# Allegro board RPI-CMIO-V3_0-PUBLIC.brd
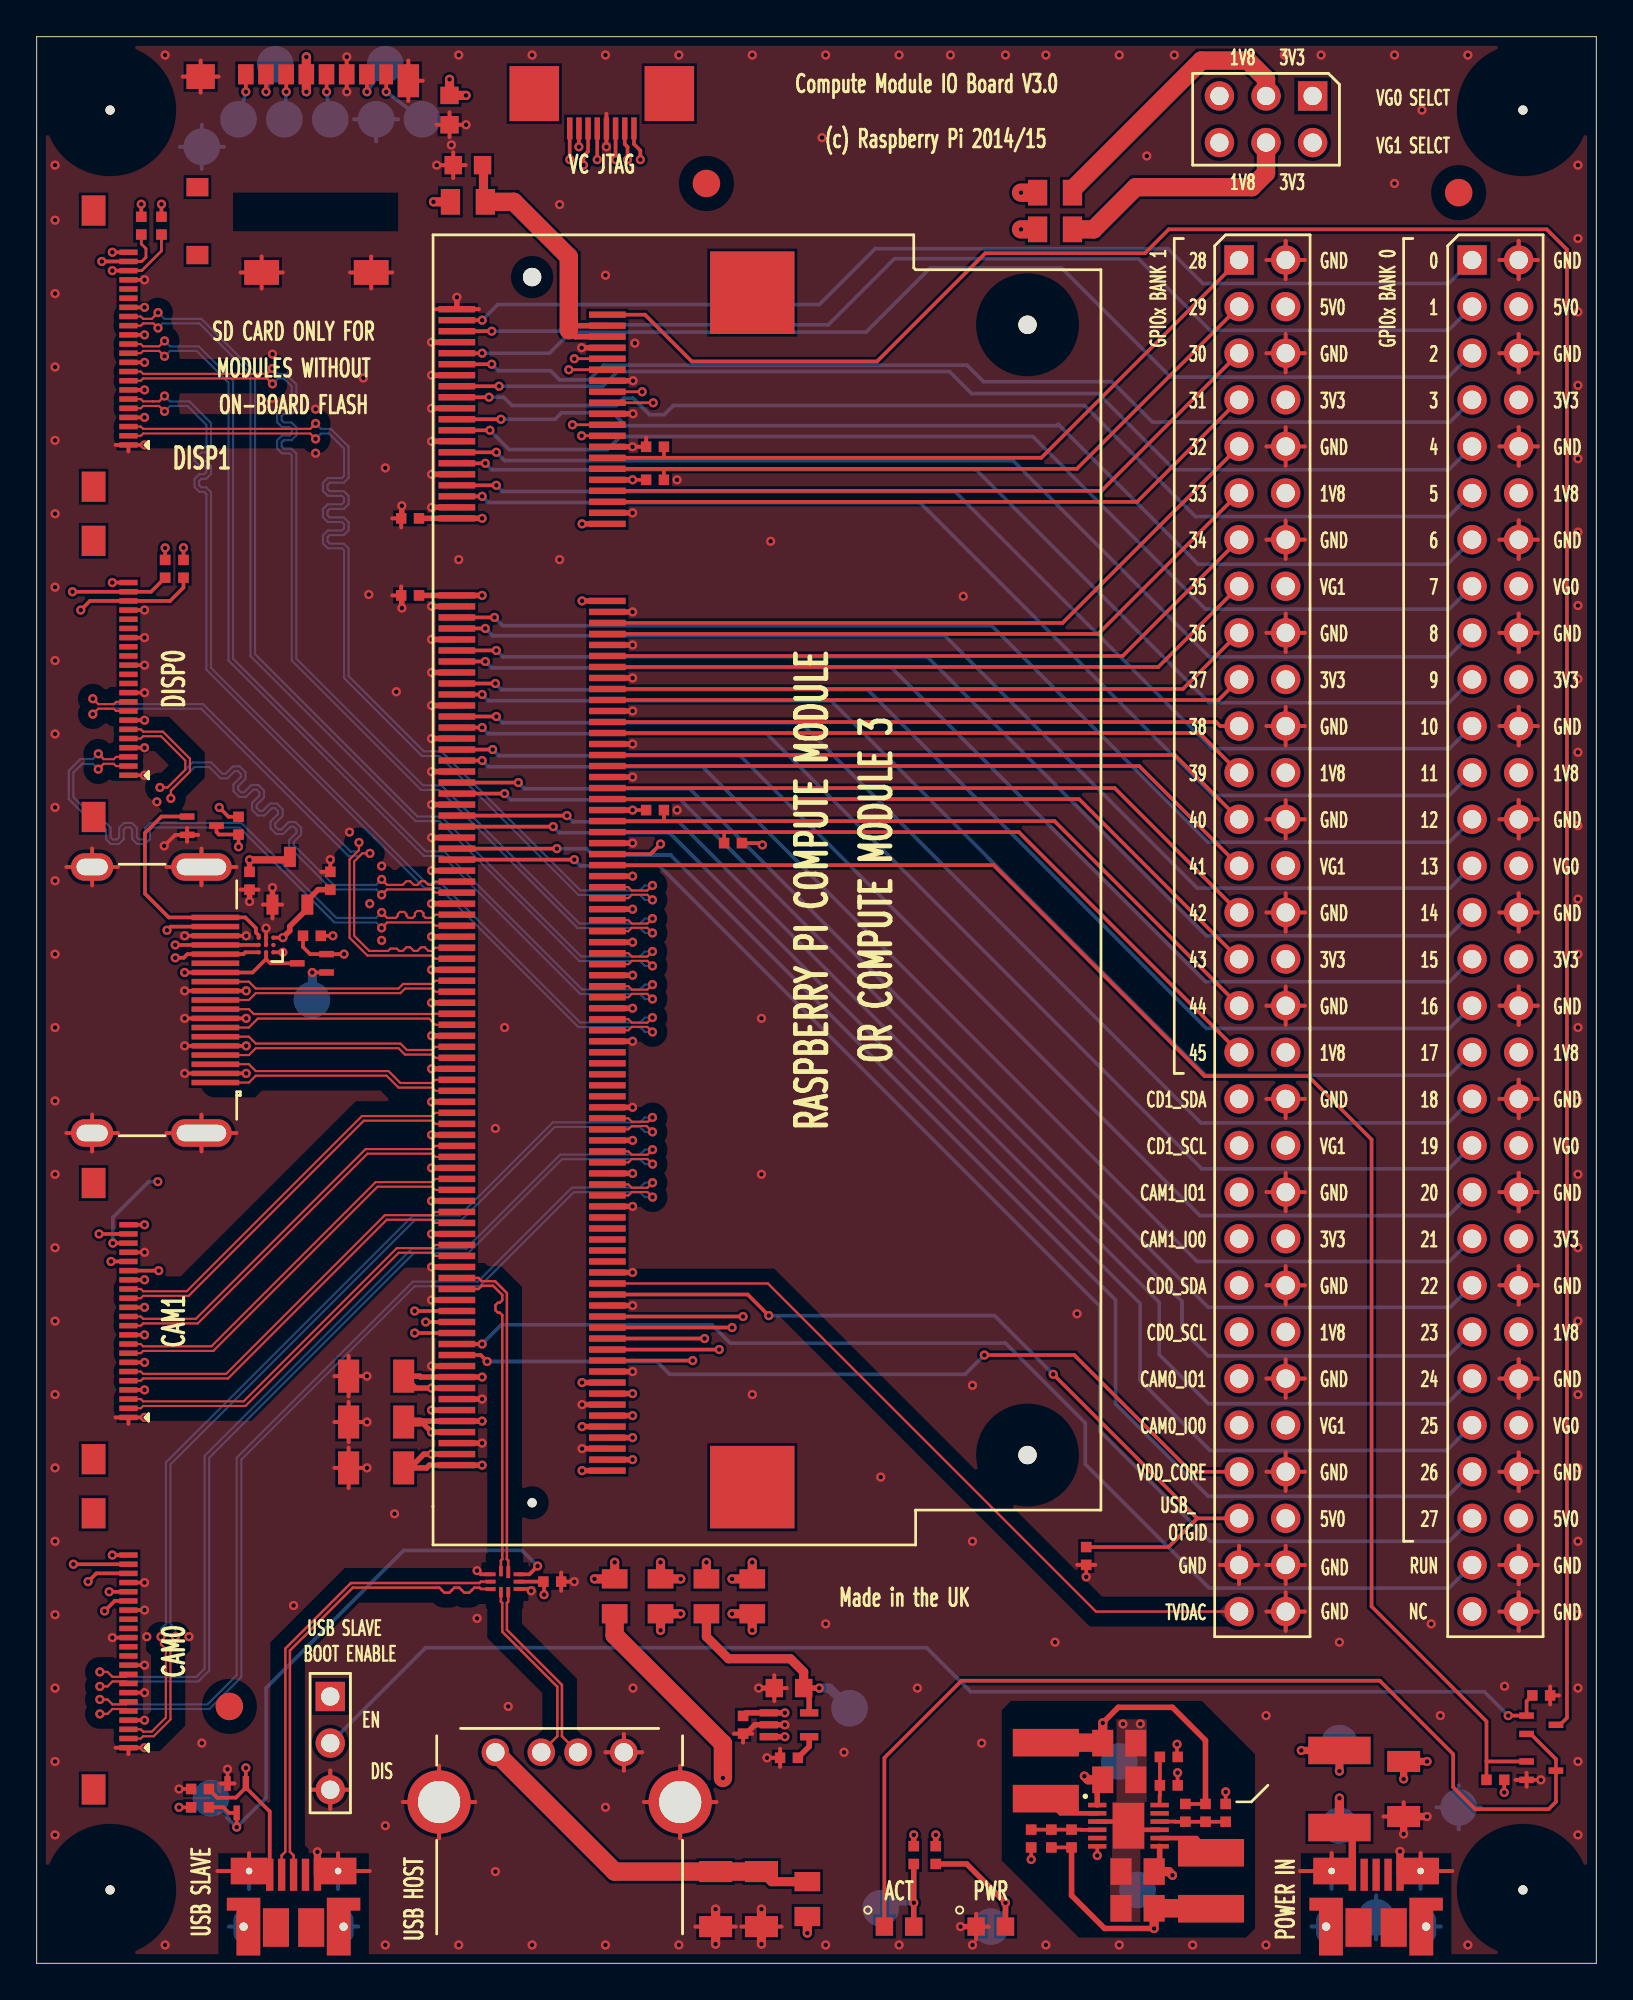
[diagram p0: board, top side]
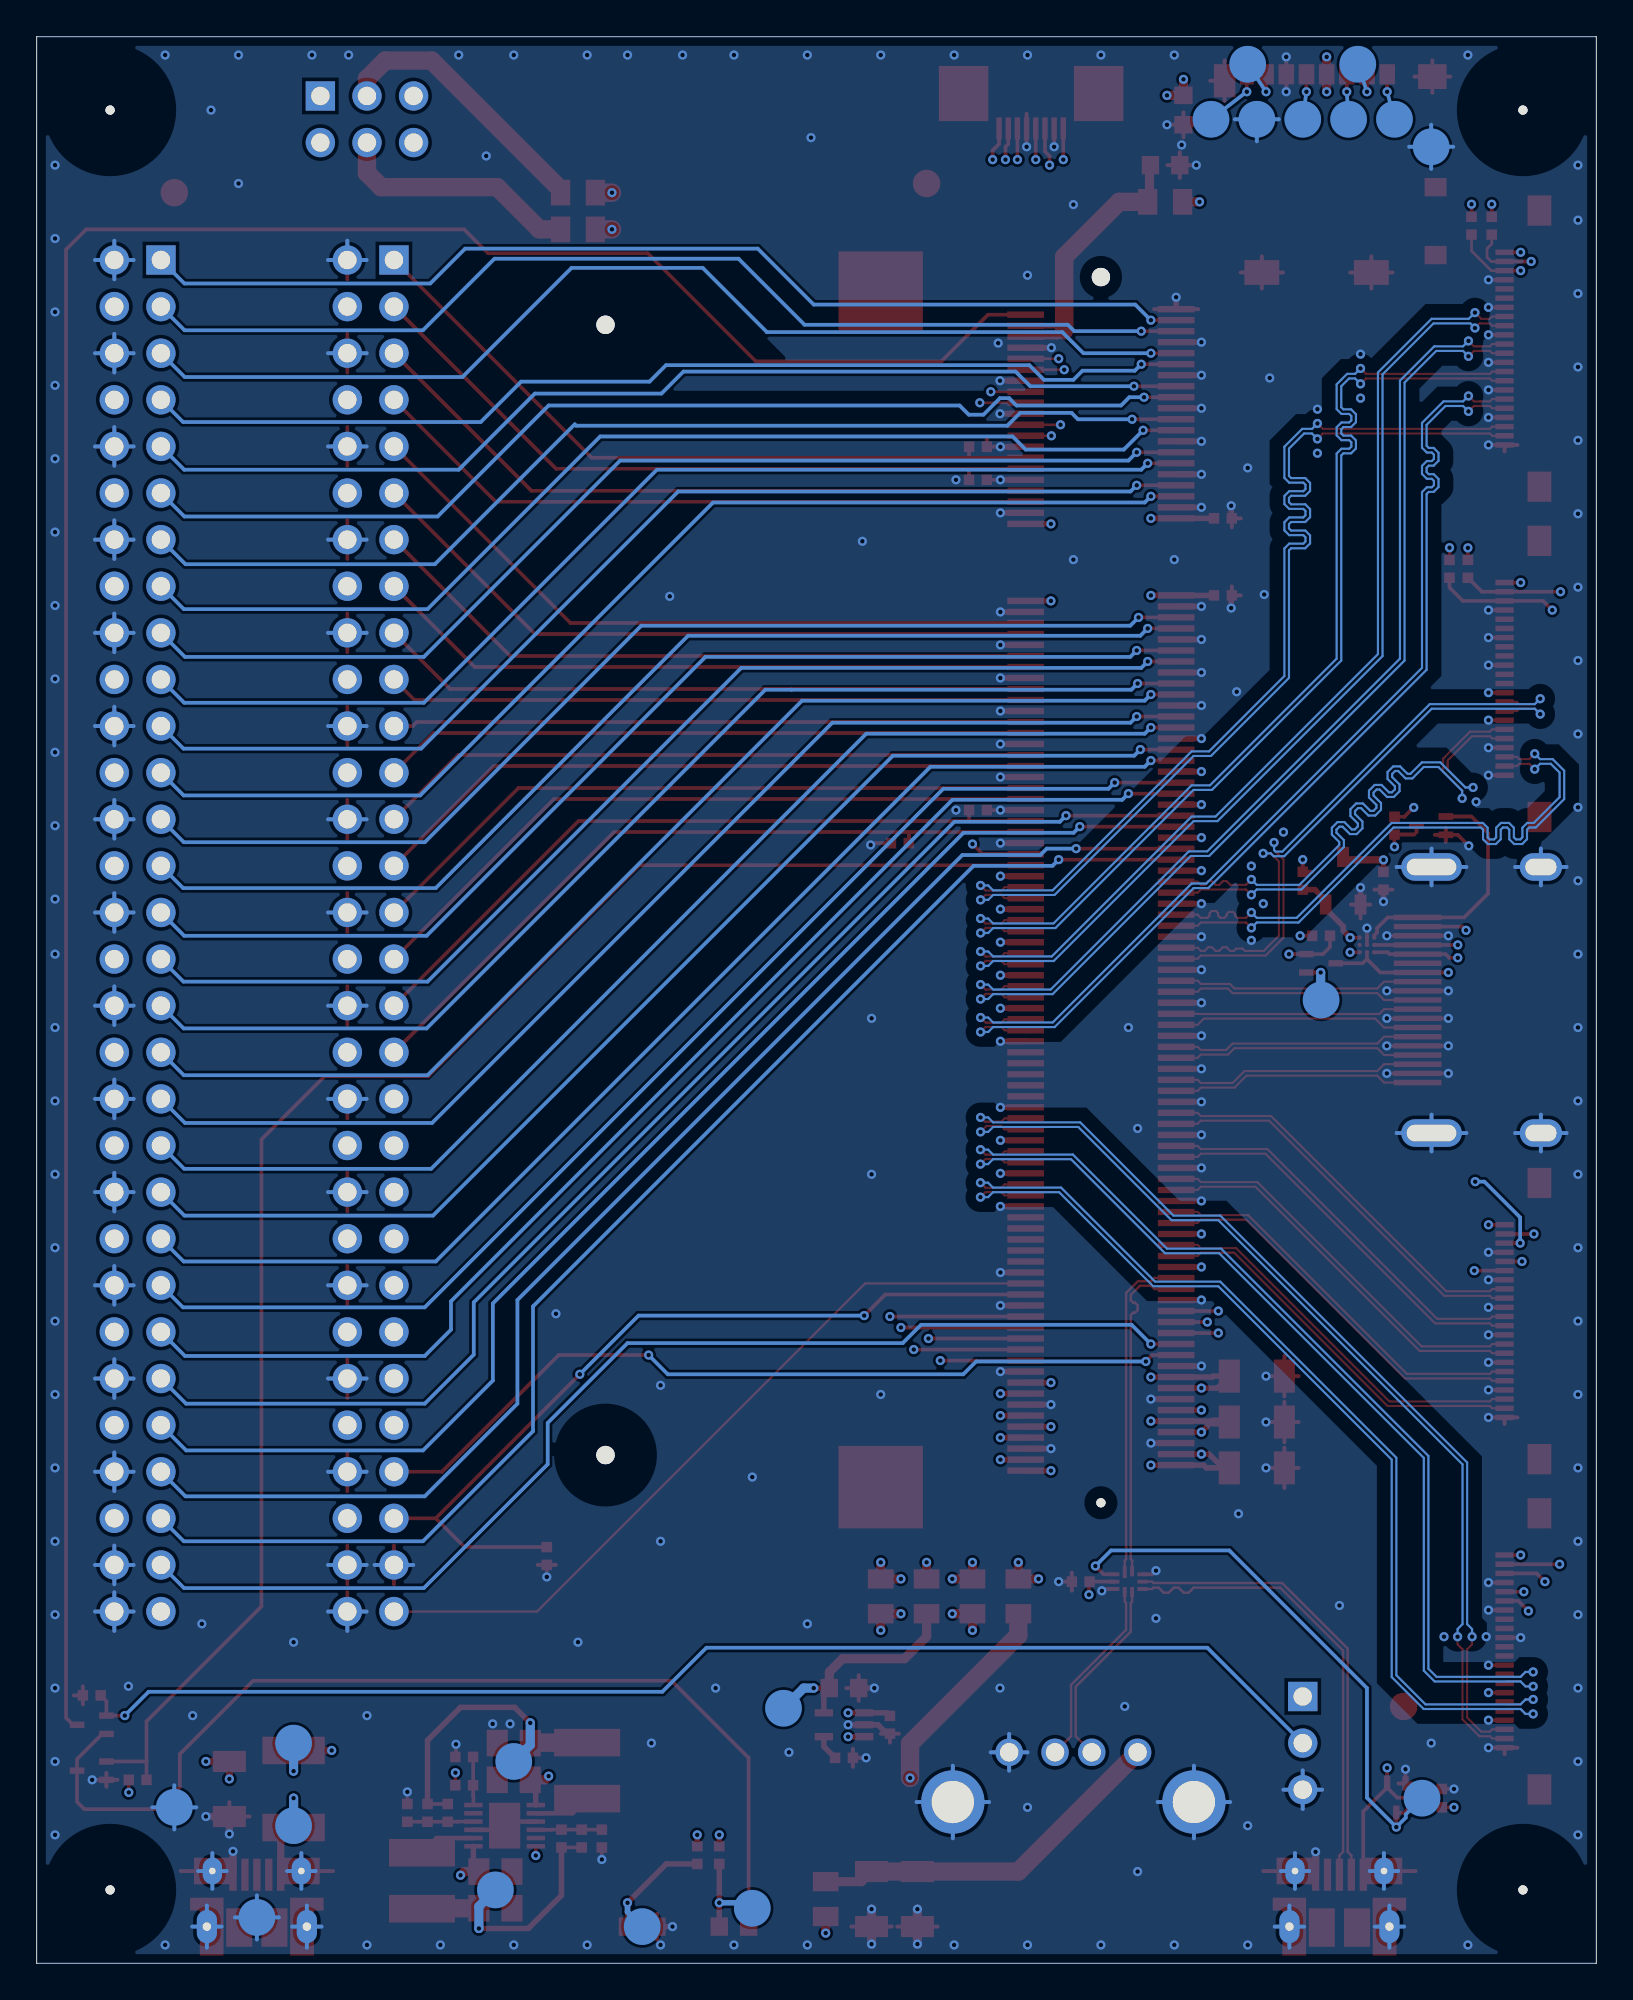
[diagram p1: board, bottom side, seen from below]

Outline 85 x 105 mm; copper layers: TOP, GNDT, PWRT, PWRB, GNDB, BOTTOM. Coordinates in mm from the lower left corner of the outline.
Outline path: 0,105 85,105 85,0 0,0 0,105

## Design rules (mm)
constraint set DEFAULT: min track width 0.115
net group CAM0_CLK: nets CAM0_CN CAM0_CP
net group CAM0_D0: nets CAM0_DN0 CAM0_DP0
net group CAM0_D1: nets CAM0_DN1 CAM0_DP1
net group CAM1_CLK: nets CAM1_CN CAM1_CP
net group CAM1_D0: nets CAM1_DN0 CAM1_DP0
net group CAM1_D1: nets CAM1_DN1 CAM1_DP1
net group CAM1_D2: nets CAM1_DN2 CAM1_DP2
net group CAM1_D3: nets CAM1_DN3 CAM1_DP3
net group DSI0_CLK: nets DSI0_CN DSI0_CP
net group DSI0_D0: nets DSI0_DN0 DSI0_DP0
net group DSI0_D1: nets DSI0_DN1 DSI0_DP1
net group DSI1_CLK: nets DSI1_CN DSI1_CP
net group DSI1_D0: nets DSI1_DN0 DSI1_DP0
net group DSI1_D1: nets DSI1_DN1 DSI1_DP1
net group DSI1_D2: nets DSI1_DN2 DSI1_DP2
net group DSI1_D3: nets DSI1_DN3 DSI1_DP3
net group HDMI_CK: nets HDMI_CK_N HDMI_CK_P
net group HDMI_D0: nets HDMI_D0_N HDMI_D0_P
net group HDMI_D1: nets HDMI_D1_N HDMI_D1_P
net group HDMI_D2: nets HDMI_D2_N HDMI_D2_P
net group USB_D: nets USB_DM USB_DP
net group USBA_D: nets USBA_DM USBA_DP
net group USBB_D: nets USBB_DM USBB_DP

## Placement (name value [footprint] x y rotation side)
C1  47u  [CAPC3216X180N]  18.5 27 180 top
C2  47u  [CAPC3216X180N]  74.5 9.5 270 top
C3  47u  [CAPC3216X180N]  18.5 29.5 180 top
C4  1u  [CAPC1005X55N]  38.5 13 270 top
C5  4.7u  [CAPC1608X90N]  41 15 180 top
C6  100n  [CAPC1005X55N]  61.7 11.25 0 top
C7  10u  [CAPC2012X145N]  60 5 180 top
C8  10u  [CAPC2012X145N]  59 10 0 top
C9  100n  [CAPC1005X55N]  41 11.2 180 top
C10  47u  [CAPC3216X180N]  18.5 32 180 top
C11  10u  [CAPC2012X145N]  60 3 180 top
C12  10u  [CAPC2012X145N]  59 12 0 top
C13  1u  [CAPC1005X55N]  20.35 78.75 180 top
C14  1u  [CAPC1005X55N]  20.35 74.55 180 top
C15  100n  [CAPC1005X55N]  11.6 59 270 top
C16  100n  [CAPC1005X55N]  16 59 90 top
C17  100n  [CAPC1005X55N]  28.1 20.8 180 top
C19  47u  [CAPC3216X180N]  37 3.5 270 top
C20  47u  [CAPC3216X180N]  39.5 3.5 270 top
C21  NF  [CAPC1005X55N]  55.3 6.8 90 top
C22  NF  [CAPC1005X55N]  63.7 8.2 270 top
C23  4.7u  [CAPC1608X90N]  23.5 98 180 top
C24  4.7u  [CAPC1608X90N]  22.5 101 270 top
D1  RED  [LEDC1608X80N]  52 2 0 top
D2  GREEN  [LEDC1608X80N]  47 2 0 top
F1  MF-MSMF200  [BOURNS_MF-MSMF150]  71 9.5 90 top
J1  DDR2 SODIMM  [FCI_10033853_CM]  27 58.5 90 top
J2  10103594-0001LF  [FCI_10103594-0001LF]  73 2 0 top
J3  6W 0.1" PIN HDR  [PINHDR_6W_2P54MM]  67 100.5 180 top
J4  3W 0.1" PIN HDR  [PINHDR_3W_2P54MM]  16 12 270 top
J5  60W 0.1" PIN HDR  [PINHDR_60W_2P54MM]  79.5 56 270 top
J6  60W 0.1" PIN HDR  [PINHDR_60W_2P54MM]  66.8 56 270 top
J7  68710814522  [WE_68710814522]  30.8 100 180 top
J9  54548-2271  [MOLEX_54548-2271]  5 17 270 top
J10  54548-2271  [MOLEX_54548-2271]  5 70 270 top
J11  54548-2271  [MOLEX_54548-2271]  5 35 270 top
J12  54548-2271  [MOLEX_54548-2271]  5 88 270 top
J13  47151-1051  [MOLEX_47151-1051]  6 52.5 270 top
J14  61400416021  [WURTH_61400416021]  28.5 11.5 90 top
J15  10103594-0001LF  [FCI_10103594-0001LF]  14 2 0 top
J16  1040310811  [MOLEX_1040310811]  14.5 98 180 top
L1  4.7u  [BOURNS_SRN4018]  64 4.5 270 top
L2  4.7u  [BOURNS_SRN4018]  55 10.5 90 top
NOREF  -  [unnamed]  4 4 0 top
NOREF#2  -  [unnamed]  81 4 0 top
NOREF#3  -  [unnamed#2]  77.5 96.5 0 top
NOREF#4  -  [unnamed#2]  36.5 97 0 top
NOREF#5  -  [unnamed#2]  10.5 14 0 top
NOREF#6  -  [unnamed]  4 101 0 top
NOREF#7  -  [#2]  110 0 0 top
NOREF#8  -  [#2]  0 166 0 top
NOREF#9  -  [unnamed]  81 101 0 top
NOREF#10  -  [#2]  110 34 0 top
NOREF#11  -  [#2]  0 105 0 top
NOREF#12  -  [#2]  85 0 90 top
NOREF#13  -  [#2]  110 65 0 top
NOREF#14  -  [#2]  0 129 0 top
PP1  PP_SMT_ROUND_2MM  [PP_SMT_R2MM]  71 7.5 180 bottom
PP2  PP_SMT_ROUND_2MM  [PP_SMT_R2MM]  60 4 180 bottom
PP3  PP_SMT_ROUND_2MM  [PP_SMT_R2MM]  71 12 180 bottom
PP4  PP_SMT_ROUND_2MM  [PP_SMT_R2MM]  44.3 13.9 180 bottom
PP5  PP_SMT_ROUND_2MM  [PP_SMT_R2MM]  77.5 8.5 180 bottom
PP6  PP_SMT_ROUND_2MM  [PP_SMT_R2MM]  59 11 180 bottom
PP7  PP_SMT_ROUND_2MM  [PP_SMT_R2MM]  52 2 180 bottom
PP8  PP_SMT_ROUND_2MM  [PP_SMT_R2MM]  73 2.5 180 bottom
PP9  PP_SMT_ROUND_2MM  [PP_SMT_R2MM]  46 3 180 bottom
PP10  PP_SMT_ROUND_2MM  [PP_SMT_R2MM]  15 52.5 180 bottom
PP11  PP_SMT_ROUND_2MM  [PP_SMT_R2MM]  9.5 9 180 bottom
PP12  PP_SMT_ROUND_2MM  [PP_SMT_R2MM]  11 100.5 180 bottom
PP13  PP_SMT_ROUND_2MM  [PP_SMT_R2MM]  13 103.5 180 bottom
PP14  PP_SMT_ROUND_2MM  [PP_SMT_R2MM]  13.5 100.5 180 bottom
PP15  PP_SMT_ROUND_2MM  [PP_SMT_R2MM]  16 100.5 180 bottom
PP16  PP_SMT_ROUND_2MM  [PP_SMT_R2MM]  19 103.5 180 bottom
PP17  PP_SMT_ROUND_2MM  [PP_SMT_R2MM]  21 100.5 180 bottom
PP18  PP_SMT_ROUND_2MM  [PP_SMT_R2MM]  18.5 100.5 180 bottom
PP19  PP_SMT_ROUND_2MM  [PP_SMT_R2MM]  9 99 180 bottom
Q1  DMG1012T  [SOT50P160X90-3N]  82 13 0 top
Q2  DMG1012T  [SOT50P160X90-3N]  82 10.5 0 top
Q3  DMG1012T  [SOT50P160X90-3N]  15 54.5 180 top
Q4  DMG1012T  [SOT50P160X90-3N]  9 62 0 top
Q5  DMG1012T  [SOT50P160X90-3N]  10.9 9 270 top
R1  0R  [RESC2012X65N]  31.5 20 90 top
R2  100K  [RESC1005X40N]  61.7 9.7 180 top
R3  470R  [RESC1005X40N]  49 5.9 270 top
R4  0R  [RESC2012X65N]  34 20 90 top
R5  0R  [RESC2012X65N]  39 20 90 top
R6  0R  [RESC2012X65N]  36.5 20 90 top
R7  0R  [RESC2012X65N]  55.5 96.5 0 top
R8  0R  [RESC2012X65N]  55.5 94.5 0 top
R9  470R  [RESC1005X40N]  47.8 5.9 270 top
R10  100K  [RESC1005X40N]  79.5 10 180 top
R12  1K  [RESC1005X40N]  57.2 22.2 90 top
R13  1.8K  [RESC1005X40N]  8 76 270 top
R14  1.8K  [RESC1005X40N]  7 76 270 top
R15  NF  [RESC1005X40N]  15 56 0 top
R16  1.8K  [RESC1005X40N]  6.8 94.7 270 top
R17  1.8K  [RESC1005X40N]  5.7 94.7 270 top
R18  100K  [RESC1005X40N]  11 62 270 top
R19  0R  [RESC2012X65N]  42 3.5 90 top
R20  47K  [RESC1005X40N]  8.9 8.5 0 top
R21  47K  [RESC1005X40N]  8.9 9.5 180 top
R22  0R  [RESC1005X40N]  56.4 6.8 90 top
R23  0R  [RESC1005X40N]  62.6 8.2 270 top
R24  NF  [RESC1005X40N]  64.8 8.2 90 top
R25  NF  [RESC1005X40N]  54.2 6.8 270 top
R26  100K  [RESC1005X40N]  33.7 80.85 180 top
R27  100K  [RESC1005X40N]  33.7 82.65 180 top
R28  100K  [RESC1005X40N]  37.95 61.05 0 top
R29  100K  [RESC1005X40N]  33.7 62.85 180 top
R30  47K  [RESC1005X40N]  82 14.6 0 top
R31  0R  [RESC2012X65N]  23.5 96 180 top
U1  PAM2306AYPKE  [DIODES_PAM2306]  59.5 7.5 0 top
U2  AP7115-25SEG  [SOT65P210X100-5N]  41 13 0 top
U3  AP2331W  [SOT95P280X135-3N]  13.8 59 90 top
U4  ESD5384  [ONSEMI_ESD5384]  12.5 55.5 180 top
U5  FSUSB42UMX  [FAIRCHILD_FSUSB42UMX]  25.5 20.8 270 top

## Library data of the parts
C1-C3 C10 C19 C20 = CAP_3216_6.3V_47u
C4 C13 C14 = CAP_1005_6.3V_1u
C5 C23 C24 = CAP_1608_6.3V_4.7u
C6 C9 C15-C17 = CAP_1005_6.3V_100n
C7 C8 C11 C12 = CAP_2012_6.3V_10u
C21 C22 = CAP_1005_NF
D1 = LED_1608_RED
D2 = LED_1608_GREEN
F1 = FUSE_POLY_2.0A_6V
J1 = CON_200W_DDR2SODIMM_CM
J2 J15 = CON_uUSB_B
J3 = CON_6W_PINHDR
J4 = CON_3W_PINHDR
J5 J6 = CON_60W_PINHDR
J7 = CON_FFC_8W
J9-J12 = CON_22W_FFC_54548-2271
J13 = CON_HDMI_RA
J14 = CON_USBA_RA_PTH
J16 = CON_uSD_1040310811
L1 L2 = IND_4u7_SRN4018-4R7M
PP1-PP19 = PP_SMT_ROUND_2MM
Q1-Q5 = MOSFET_N_DMG1012T
R1 R4-R8 R19 R31 = RES_2012_0R
R2 R10 R18 R26-R29 = RES_1005_100K
R3 R9 = RES_1005_470R
R12 = RES_1005_1K
R13 R14 R16 R17 = RES_1005_1.8K
R15 = RES_1005_27K
R20 R21 R30 = RES_1005_47K
R22 R23 = RES_1005_0R
R24 R25 = RES_1005_NF
U1 = IC_SMPS_DUAL_1A_3V3_1V8
U2 = IC_AP7115-25SEG
U3 = IC_AP2331W
U4 = IC_ESD5384
U5 = IC_MUX2-1_USB

## Footprints (pads in the part's own frame, mm; a bottom-side part is the same pattern mirrored in y, then rotated)
BOURNS_MF-MSMF150
  rect 1.5x3.4 smd: 1(-2.1,0) 2(2.1,0)
BOURNS_SRN4018
  rect 1.5x3.6 smd: 1(-1.525,0) 2(1.525,0)
CAPC1005X55N
  rect 0.57x0.58 smd: 1(-0.485,0) 2(0.485,0)
CAPC1608X90N
  rect 0.95x1 smd: 1(-0.8,0) 2(0.8,0)
CAPC2012X145N
  rect 1.15x1.45 smd: 1(-0.9,0) 2(0.9,0)
CAPC3216X180N
  rect 1.15x1.8 smd: 1(-1.5,0) 2(1.5,0)
DIODES_PAM2306
  rect 1x0.25 smd: 1(-1.7,1.125) 2(-1.7,0.675) 3(-1.7,0.225) 4(-1.7,-0.225) 5(-1.7,-0.675) 6(-1.7,-1.125) 7(1.7,-1.125) 8(1.7,-0.675) 9(1.7,-0.225) 10(1.7,0.225) 11(1.7,0.675) 12(1.7,1.125)
  rect 1.7x2.5 smd: 13(0,0)
FAIRCHILD_FSUSB42UMX
  rect 0.66x0.21 smd: 1(-0.52,0.2)
  rect 0.56x0.21 smd: 2(-0.57,-0.2) 6(0.57,-0.2) 7(0.57,0.2)
  rect 0.21x0.56 smd: 3(-0.4,-0.77) 4(0,-0.77) 5(0.4,-0.77) 8(0.4,0.77) 9(0,0.77) 10(-0.4,0.77)
FCI_10033853_CM
  round 0.5 hole 1.1 unplated: (-33.4,0)
  rect 4.5x4.6 smd: (-32.55,-12) (32.55,-12)
  round 1 hole 2.4 unplated: (-30.8,-27) (30.8,-27)
  round 1 hole 1.6 unplated: (33.4,0)
  rect 0.35x2 smd: 1(31.65,4.1) 2(31.35,-4.1) 3(31.05,4.1) 4(30.75,-4.1) 5(30.45,4.1) 6(30.15,-4.1) 7(29.85,4.1) 8(29.55,-4.1) 9(29.25,4.1) 10(28.95,-4.1) 11(28.65,4.1) 12(28.35,-4.1) 13(28.05,4.1) 14(27.75,-4.1) 15(27.45,4.1) 16(27.15,-4.1) 17(26.85,4.1) 18(26.55,-4.1) 19(26.25,4.1) 20(25.95,-4.1) 21(25.65,4.1) 22(25.35,-4.1) 23(25.05,4.1) 24(24.75,-4.1) 25(24.45,4.1) 26(24.15,-4.1) 27(23.85,4.1) 28(23.55,-4.1) 29(23.25,4.1) 30(22.95,-4.1) 31(22.65,4.1) 32(22.35,-4.1) 33(22.05,4.1) 34(21.75,-4.1) 35(21.45,4.1) 36(21.15,-4.1) 37(20.85,4.1) 38(20.55,-4.1) 39(20.25,4.1) 40(19.95,-4.1) 41(16.05,4.1) 42(15.75,-4.1) 43(15.45,4.1) 44(15.15,-4.1) 45(14.85,4.1) 46(14.55,-4.1) 47(14.25,4.1) 48(13.95,-4.1) 49(13.65,4.1) 50(13.35,-4.1) 51(13.05,4.1) 52(12.75,-4.1) 53(12.45,4.1) 54(12.15,-4.1) 55(11.85,4.1) 56(11.55,-4.1) 57(11.25,4.1) 58(10.95,-4.1) 59(10.65,4.1) 60(10.35,-4.1) 61(10.05,4.1) 62(9.75,-4.1) 63(9.45,4.1) 64(9.15,-4.1) 65(8.85,4.1) 66(8.55,-4.1) 67(8.25,4.1) 68(7.95,-4.1) 69(7.65,4.1) 70(7.35,-4.1) 71(7.05,4.1) 72(6.75,-4.1) 73(6.45,4.1) 74(6.15,-4.1) 75(5.85,4.1) 76(5.55,-4.1) 77(5.25,4.1) 78(4.95,-4.1) 79(4.65,4.1) 80(4.35,-4.1) 81(4.05,4.1) 82(3.75,-4.1) 83(3.45,4.1) 84(3.15,-4.1) 85(2.85,4.1) 86(2.55,-4.1) 87(2.25,4.1) 88(1.95,-4.1) 89(1.65,4.1) 90(1.35,-4.1) 91(1.05,4.1) 92(0.75,-4.1) 93(0.45,4.1) 94(0.15,-4.1) 95(-0.15,4.1) 96(-0.45,-4.1) 97(-0.75,4.1) 98(-1.05,-4.1) 99(-1.35,4.1) 100(-1.65,-4.1) 101(-1.95,4.1) 102(-2.25,-4.1) 103(-2.55,4.1) 104(-2.85,-4.1) 105(-3.15,4.1) 106(-3.45,-4.1) 107(-3.75,4.1) 108(-4.05,-4.1) 109(-4.35,4.1) 110(-4.65,-4.1) 111(-4.95,4.1) 112(-5.25,-4.1) 113(-5.55,4.1) 114(-5.85,-4.1) 115(-6.15,4.1) 116(-6.45,-4.1) 117(-6.75,4.1) 118(-7.05,-4.1) 119(-7.35,4.1) 120(-7.65,-4.1) 121(-7.95,4.1) 122(-8.25,-4.1) 123(-8.55,4.1) 124(-8.85,-4.1) 125(-9.15,4.1) 126(-9.45,-4.1) 127(-9.75,4.1) 128(-10.05,-4.1) 129(-10.35,4.1) 130(-10.65,-4.1) 131(-10.95,4.1) 132(-11.25,-4.1) 133(-11.55,4.1) 134(-11.85,-4.1) 135(-12.15,4.1) 136(-12.45,-4.1) 137(-12.75,4.1) 138(-13.05,-4.1) 139(-13.35,4.1) 140(-13.65,-4.1) 141(-13.95,4.1) 142(-14.25,-4.1) 143(-14.55,4.1) 144(-14.85,-4.1) 145(-15.15,4.1) 146(-15.45,-4.1) 147(-15.75,4.1) 148(-16.05,-4.1) 149(-16.35,4.1) 150(-16.65,-4.1) 151(-16.95,4.1) 152(-17.25,-4.1) 153(-17.55,4.1) 154(-17.85,-4.1) 155(-18.15,4.1) 156(-18.45,-4.1) 157(-18.75,4.1) 158(-19.05,-4.1) 159(-19.35,4.1) 160(-19.65,-4.1) 161(-19.95,4.1) 162(-20.25,-4.1) 163(-20.55,4.1) 164(-20.85,-4.1) 165(-21.15,4.1) 166(-21.45,-4.1) 167(-21.75,4.1) 168(-22.05,-4.1) 169(-22.35,4.1) 170(-22.65,-4.1) 171(-22.95,4.1) 172(-23.25,-4.1) 173(-23.55,4.1) 174(-23.85,-4.1) 175(-24.15,4.1) 176(-24.45,-4.1) 177(-24.75,4.1) 178(-25.05,-4.1) 179(-25.35,4.1) 180(-25.65,-4.1) 181(-25.95,4.1) 182(-26.25,-4.1) 183(-26.55,4.1) 184(-26.85,-4.1) 185(-27.15,4.1) 186(-27.45,-4.1) 187(-27.75,4.1) 188(-28.05,-4.1) 189(-28.35,4.1) 190(-28.65,-4.1) 191(-28.95,4.1) 192(-29.25,-4.1) 193(-29.55,4.1) 194(-29.85,-4.1) 195(-30.15,4.1) 196(-30.45,-4.1) 197(-30.75,4.1) 198(-31.05,-4.1) 199(-31.35,4.1) 200(-31.65,-4.1)
FCI_10103594-0001LF
  rect 1.42x2.1 smd: (-0.96,-0.05) (0.96,-0.05)
  rect 0.4x1.75 smd: 1(-1.3,2.825) 2(-0.65,2.825) 3(0,2.825) 4(0.65,2.825) 5(1.3,2.825)
  custom 2x1.45 hole 1.05x0.65: 6(-2.425,3.03) 8(2.425,3.03)
  custom 1.825x3.15 hole 0.7x1.4: 7(-2.725,0) 9(2.725,0)
LEDC1608X80N
  rect 0.95x1 smd: 1(-0.8,0) 2(0.8,0)
MOLEX_47151-1051
  rect 0.3x2.6 smd: 1(4.5,3.74) 2(4,3.74) 3(3.5,3.74) 4(3,3.74) 5(2.5,3.74) 6(2,3.74) 7(1.5,3.74) 8(1,3.74) 9(0.5,3.74) 10(0,3.74) 11(-0.5,3.74) 12(-1,3.74) 13(-1.5,3.74) 14(-2,3.74) 15(-2.5,3.74) 16(-3,3.74) 17(-3.5,3.74) 18(-4,3.74) 19(-4.5,3.74)
  oval 1.5x3.3 hole 0.9x2.7: 20(7.25,2.98) 22(-7.25,2.98)
  oval 1.5x2.3 hole 0.9x1.7: 21(7.25,-2.98) 23(-7.25,-2.98)
MOLEX_54548-2271
  rect 1.65x1.3 smd: (-7.525,-1.9) (7.525,-1.9)
  rect 0.3x1 smd: 1(5.25,0) 2(4.75,0) 3(4.25,0) 4(3.75,0) 5(3.25,0) 6(2.75,0) 7(2.25,0) 8(1.75,0) 9(1.25,0) 10(0.75,0) 11(0.25,0) 12(-0.25,0) 13(-0.75,0) 14(-1.25,0) 15(-1.75,0) 16(-2.25,0) 17(-2.75,0) 18(-3.25,0) 19(-3.75,0) 20(-4.25,0) 21(-4.75,0) 22(-5.25,0)
MOLEX_1040310811
  rect 0.85x1.1 smd: 1(3.105,-4.95) 2(2.005,-4.95) 3(0.905,-4.95) 4(-0.195,-4.95) 5(-1.295,-4.95) 6(-2.395,-4.95) 7(-3.495,-4.95)
  rect 0.75x1.1 smd: 8(-4.545,-4.95)
  rect 1.2x1 smd: 9(5.74,1.2) 10(5.74,4.9)
  rect 1.17x1.8 smd: 11(-5.755,-4.6)
  rect 1.55x1.35 smd: 12(5.565,-4.825)
  rect 1.9x1.35 smd: 13(2.24,5.85) 14(-3.73,5.85)
ONSEMI_ESD5384
  round 0.235 smd: A1(-0.4,0.4) A2(0,0.4) A3(0.4,0.4) B1(-0.4,0) B2(0,0) B3(0.4,0) C1(-0.4,-0.4) C2(0,-0.4) C3(0.4,-0.4)
PINHDR_3W_2P54MM
  rect 1.6x1.6 hole 1: 1(-2.54,0)
  round 1.6 hole 1: 2(0,0) 3(2.54,0)
PINHDR_6W_2P54MM
  rect 1.6x1.6 hole 1: 1(-2.54,-1.27)
  round 1.6 hole 1: 2(-2.54,1.27) 3(0,-1.27) 4(0,1.27) 5(2.54,-1.27) 6(2.54,1.27)
PINHDR_60W_2P54MM
  rect 1.6x1.6 hole 1: 1(-36.83,-1.27)
  round 1.6 hole 1: 2(-36.83,1.27) 3(-34.29,-1.27) 4(-34.29,1.27) 5(-31.75,-1.27) 6(-31.75,1.27) 7(-29.21,-1.27) 8(-29.21,1.27) 9(-26.67,-1.27) 10(-26.67,1.27) 11(-24.13,-1.27) 12(-24.13,1.27) 13(-21.59,-1.27) 14(-21.59,1.27) 15(-19.05,-1.27) 16(-19.05,1.27) 17(-16.51,-1.27) 18(-16.51,1.27) 19(-13.97,-1.27) 20(-13.97,1.27) 21(-11.43,-1.27) 22(-11.43,1.27) 23(-8.89,-1.27) 24(-8.89,1.27) 25(-6.35,-1.27) 26(-6.35,1.27) 27(-3.81,-1.27) 28(-3.81,1.27) 29(-1.27,-1.27) 30(-1.27,1.27) 31(1.27,-1.27) 32(1.27,1.27) 33(3.81,-1.27) 34(3.81,1.27) 35(6.35,-1.27) 36(6.35,1.27) 37(8.89,-1.27) 38(8.89,1.27) 39(11.43,-1.27) 40(11.43,1.27) 41(13.97,-1.27) 42(13.97,1.27) 43(16.51,-1.27) 44(16.51,1.27) 45(19.05,-1.27) 46(19.05,1.27) 47(21.59,-1.27) 48(21.59,1.27) 49(24.13,-1.27) 50(24.13,1.27) 51(26.67,-1.27) 52(26.67,1.27) 53(29.21,-1.27) 54(29.21,1.27) 55(31.75,-1.27) 56(31.75,1.27) 57(34.29,-1.27) 58(34.29,1.27) 59(36.83,-1.27) 60(36.83,1.27)
PP_SMT_R2MM
  round 2 smd: 1(0,0)
RESC1005X40N
  rect 0.57x0.58 smd: 1(-0.485,0) 2(0.485,0)
RESC2012X65N
  rect 1.05x1.4 smd: 1(-0.95,0) 2(0.95,0)
SOT50P160X90-3N
  rect 0.8x0.35 smd: 1(-0.8,0.5) 2(-0.8,-0.5) 3(0.8,0)
SOT65P210X100-5N
  rect 1x0.4 smd: 1(-1.1,0.65) 2(-1.1,0) 3(-1.1,-0.65) 4(1.1,-0.65) 5(1.1,0.65)
SOT95P280X135-3N
  rect 1.1x0.65 smd: 1(-1.3,0.95) 2(-1.3,-0.95) 3(1.3,0)
unnamed
  round 0.5 hole 3.4 unplated: (0,0)
unnamed#2
  round 1.5 smd: (0,0)
WE_68710814522
  rect 2.7x3 smd: (-3.68,-1.9) (3.68,-1.9)
  rect 0.3x1.2 smd: 1(-1.75,0) 2(-1.25,0) 3(-0.75,0) 4(-0.25,0) 5(0.25,0) 6(0.75,0) 7(1.25,0) 8(1.75,0)
WURTH_61400416021
  round 1.5 hole 1: 1(0,3.5) 2(0,1) 3(0,-1) 4(0,-3.5)
  round 3.45 hole 2.3: 5(-2.71,6.57) 6(-2.71,-6.57)

## Nets
1V8: C12.1 C22.1 J3.5 J3.6(P6) J5.12 J5.24 J5.36 J5.48 J6.12 J6.24 J6.36 J6.48 L2.2 PP6.1 R5.1 R10.1 R18.1 R23.1
3V3: C4.1 C11.1 C17.2 C21.1 C24.1 J3.1 J3.2 J5.8 J5.20 J5.32 J5.44 J6.8 J6.20 J6.32 J6.44 J9.22 J10.22 J11.22 J12.22 J16.4 L1.2 PP2.1 R3.1 R4.1 R9.1 R13.1 R14.1 R15.2 R16.1 R17.1 R20.1 R22.1 R31.2 U2.1 U2.3 U5.9(VCC)
5V: C2.1 C7.1 C8.1 C15.1 F1.2(P2) J5.4 J5.56 J6.4 J6.56 PP3.1 R1.1 R2.1 R19.1 U1.1(VIN2) U1.6 U1.7 U3.3
GND: C1.2 C2.2 C3.2 C4.2 C5.2 C6.2 C7.2 C8.2 C9.2 C10.2 C11.2 C12.2 C13.2 C14.2 C15.2 C16.2 C17.1 C19.2 C20.2 C23.2 C24.2 D1.1(CATHODE) J1.1 J1.7 J1.8 J1.13 J1.14 J1.19 J1.20 J1.25 J1.26 J1.31 J1.32 J1.37 J1.38 J1.43 J1.44 J1.49 J1.50 J1.55 J1.56 J1.61 J1.62 J1.67 J1.68 J1.73 J1.74 J1.79 J1.80 J1.85 J1.86 J1.91 J1.92 J1.97 J1.98 J1.103 J1.104 J1.109 J1.110 J1.115 J1.116 J1.121 J1.122 J1.127 J1.133 J1.134 J1.139 J1.140 J1.145 J1.146 J1.151 J1.152 J1.157 J1.163 J1.164 J1.169 J1.170 J1.181 J1.182 J1.187 J1.188 J1.195 J1.196 J2.5 J2.6 J2.7 J2.8 J2.9(SH4) J4.3(P3) J5.2 J5.6 J5.10 J5.14 J5.18 J5.22 J5.26 J5.30 J5.34 J5.38 J5.42 J5.46 J5.50 J5.54 J5.58 J5.60 J6.2 J6.6 J6.10 J6.14 J6.18 J6.22 J6.26 J6.30 J6.34 J6.38 J6.42 J6.46 J6.50 J6.54 J6.57 J6.58 J6.60 J7.4 J7.7 J9.1 J9.4 J9.7 J9.10 J9.13 J9.16 J9.19 J10.1 J10.4 J10.7 J10.10 J10.13 J10.16 J10.19 J11.1 J11.4 J11.7 J11.10 J11.13 J11.16 J11.19 J12.1 J12.4 J12.7 J12.10 J12.13 J12.16 J12.19 J13.2 J13.5 J13.8 J13.11 J13.17 J13.20 J13.21 J13.22 J13.23(SH4) J14.4 J14.5 J14.6(P6) J15.5 J15.6 J15.7 J15.8 J15.9(SH4) J16.6(VSS) J16.11 J16.12 J16.13 J16.14 PP5.1 PP8.1 PP18.1 PP19.1 Q2.2(S) Q4.2(S) Q5.2(S) R12.1 R21.2 R24.2 R25.2 R26.2 R27.2 R28.2 R29.2 R30.2 U1.3 U1.9 U1.13 U2.2 U3.1 U4.B2 U4.C2 U5.3 U5.8
VBUSA: C19.1 C20.1 J14.1 R19.2
VBUSB: J4.1 J15.1 Q5.1 R21.1
VDD_CORE: J1.179 J6.53
CAM0_CN: J1.144 J9.8
CAM0_CP: J1.142 J9.9(P9)
CAM0_DN0: J1.138 J9.2
CAM0_DN1: J1.150 J9.5
CAM0_DP0: J1.136 J9.3
CAM0_DP1: J1.148 J9.6
CAM0_IO0: J6.51 J9.17
CAM0_IO1: J6.49 J9.18
CAM1_CN: J1.149 J11.8
CAM1_CP: J1.147 J11.9(P9)
CAM1_DN0: J1.161 J11.2
CAM1_DN1: J1.155 J11.5
CAM1_DN2: J1.143 J11.11
CAM1_DN3: J1.137 J11.14
CAM1_DP0: J1.159 J11.3
CAM1_DP1: J1.153 J11.6
CAM1_DP2: J1.141 J11.12
CAM1_DP3: J1.135 J11.15
CAM1_IO0: J6.43 J11.17
CAM1_IO1: J6.41 J11.18
CD0_SCL: J6.47 J9.20 J10.20 R13.2
CD0_SDA: J6.45 J9.21 J10.21 R14.2
CD1_SCL: J6.39 J11.20 J12.20 R16.2
CD1_SDA: J6.37 J11.21 J12.21 R17.2
CEC: J13.13 Q3.3 U4.A2
CM_1V8: C10.1 J1.183 J1.184 J1.185 J1.186 R5.2
CM_3V3: C3.1 J1.191 J1.192 J1.193 J1.194 R4.2
CM_VBAT: C1.1 J1.197 J1.198 J1.199 J1.200 R1.2
CM_VDAC: J1.189 J1.190 R6.2
DAC_2V5: C5.1 PP4.1 R6.1 U2.5(VOUT)
DSI0_CN: J1.105 J10.8
DSI0_CP: J1.107 J10.9(P9)
DSI0_DN0: J1.99 J10.2
DSI0_DN1: J1.93 J10.5
DSI0_DP0: J1.101 J10.3
DSI0_DP1: J1.95 J10.6
DSI1_CN: J1.102 J12.8
DSI1_CP: J1.100 J12.9(P9)
DSI1_DN0: J1.96 J12.2
DSI1_DN1: J1.120 J12.5
DSI1_DN2: J1.114 J12.11
DSI1_DN3: J1.108 J12.14
DSI1_DP0: J1.94 J12.3
DSI1_DP1: J1.118 J12.6
DSI1_DP2: J1.112 J12.12
DSI1_DP3: J1.106 J12.15
EMMC_DISABLE_N: J1.2 Q1.3
EMMC_EN_N_1V8: J1.90 Q2.1 R10.2
GPIO0: J1.3 J5.1
GPIO0-27_VREF: C13.1 J1.39 J1.40 R7.1
GPIO1: J1.5 J5.3
GPIO2: J1.9 J5.5
GPIO3: J1.11 J5.7
GPIO4: J1.15 J5.9(P9)
GPIO5: J1.17 J5.11
GPIO6: J1.21 J5.13
GPIO7: J1.23 J5.15
GPIO8: J1.27 J5.17
GPIO9: J1.29 J5.19
GPIO10: J1.33 J5.21
GPIO11: J1.35 J5.23
GPIO12: J1.45 J5.25
GPIO13: J1.47 J5.27
GPIO14: J1.51 J5.29
GPIO15: J1.53 J5.31
GPIO16: J1.57 J5.33
GPIO17: J1.59 J5.35
GPIO18: J1.63 J5.37
GPIO19: J1.65 J5.39
GPIO20: J1.69 J5.41
GPIO21: J1.71 J5.43
GPIO22: J1.75 J5.45
GPIO23: J1.77 J5.47
GPIO24: J1.81 J5.49
GPIO25: J1.83 J5.51
GPIO26: J1.87 J5.53
GPIO27: J1.89 J5.55
GPIO28: J1.28 J6.1 R27.1
GPIO28-45_VREF: C14.1 J1.41 J1.42 R8.1
GPIO29: J1.30 J6.3 R26.1
GPIO30: J1.34 J6.5
GPIO31: J1.36 J6.7
GPIO32: J1.46 J6.9(P9)
GPIO33: J1.48 J6.11
GPIO34: J1.52 J6.13
GPIO35: J1.54 J6.15
GPIO36: J1.58 J6.17
GPIO37: J1.60 J6.19
GPIO38: J1.64 J6.21
GPIO39: J1.66 J6.23
GPIO40: J1.70 J6.25
GPIO41: J1.72 J6.27
GPIO42: J1.76 J6.29
GPIO43: J1.78 J6.31
GPIO44: J1.82 J6.33 R29.1
GPIO45: J1.84 J6.35 R28.1
H5V: C16.1 J13.18 PP10.1 Q3.1 U3.2(OUT) U4.A1 U4.C1
HDMI_CEC: J1.171 Q3.2(S) R15.1
HDMI_CK_N: J1.111 J13.12
HDMI_CK_P: J1.113 J13.10
HDMI_D0_N: J1.117 J13.9
HDMI_D0_P: J1.119 J13.7
HDMI_D1_N: J1.123 J13.6
HDMI_D1_P: J1.125 J13.4
HDMI_D2_N: J1.129 J13.3
HDMI_D2_P: J1.131 J13.1
HDMI_HPD: J13.19 Q4.1 U4.C3
HDMI_HPD_N_1V8: J1.88 Q4.3 R18.2
HDMI_SCL: J1.175 J13.15 U4.A3
HDMI_SDA: J1.173 J13.16 U4.B3(SDA)
RUN: J1.177 J5.57 J7.1
SDX_CLK: J1.10 J16.5 PP15.1
SDX_CMD: J1.12 J16.3 PP14.1
SDX_D0: J1.16 J16.7 PP16.1
SDX_D1: J1.18 J16.8 PP17.1
SDX_D2: J1.22 J16.1 PP12.1
SDX_D3: J1.24 J16.2 PP13.1
SDX_VREF: C23.1 J1.4 J1.6 R31.1
TVDAC: J1.166 J6.59
USB_DM: J1.167 U5.2
USB_DP: J1.165 U5.1
USB_OTGID: J1.168 J6.55 R12.2
USBA_DM: J14.2 U5.6
USBA_DP: J14.3 U5.7
USBB_DM: J15.2 U5.4
USBB_DP: J15.3 U5.5
VC_TCK: J1.180 J7.8(P8)
VC_TDI: J1.174 J7.3
VC_TDO: J1.178 J7.5
VC_TMS: J1.176 J7.6
VC_TRST_N: J1.172 J7.2
VG0: J3.3 J5.16 J5.28 J5.40 J5.52 R7.2
VG1: J3.4 J6.16 J6.28 J6.40 J6.52 R8.2
N1195355: D2.2 PP9.1 R9.2
N1195439: D2.1(CATHODE) Q1.2(S) Q2.3
N1202496: C6.1 R2.2 U1.12
N1202592: L1.1 U1.8
N1202604: L2.1 U1.2
N1202780: F1.1 J2.1 PP1.1
N1203166: C9.1 U2.4
N1203318: D1.2 PP7.1 R3.2
N1313759: C21.2 R22.2 R25.1 U1.4
N1313939: C22.2 R23.2 R24.1 U1.10
N1329395: PP11.1 Q5.3 R20.2 U5.10
N1357591: J4.2 Q1.1 R30.1

Pads without a net: J1 124 126 128 130 132 154 156 158 160 162; J2 2 3 4; J5 59; J9 11 12 14 15; J10 11 12 14 15 17 18; J12 17 18; J13 14; J15 4; J16 9 10; U1 5 11; U4 B1

## Via types
v1: diameter 0.5, hole 0.25, TOP to BOTTOM, 476 vias

## Routing (per net, layer and track width the routed paths; a pad name or vN(x,y) marks a point on that pad's centre or on a via; arc(x,y) is an arc through that point)
1V8: length 64.9
  TOP w0.2: v1(79.98,9.31) 79.98,9.99 R10.1 ; R18.1 10.46,62.48 v1(9.95,62.99) ; R23.1 C22.1 ; 63.67,8.68 63.7,8.65
  TOP w0.3: v1(58.1,13.1) 58.95,13.95 61.9,13.95 63.7,12.15 C22.1 63.7,8.65
  TOP w0.5: C12.1 v1(58.1,13.1) ; v1(39,18.15) R5.1 v1(37.9,19.05)
  TOP w1: L2.2 58.08,12.03 C12.1
  PWRT w0.2: v1(79.98,9.31) 79.98,12.43 80,12.45
  PWRT w0.215: 79.67,49.65 J5.36 ; J5.36 80.77,50.75 ; J5.36 80.77,48.55 ; 66.97,49.65 J6.36 ; J6.36 68.07,50.75 ; J6.36 68.07,48.55 ; J6.36 69.17,49.65 ; 63.36,99.23 J3.6 ; J3.6 64.46,98.13 ; J3.6 64.46,100.33 ; J3.6 65.56,99.23 ; J6.12 68.07,81.23 ; J6.12 68.07,79.03 ; J6.12 69.17,80.13 ; J6.12 66.97,80.13 ; 79.67,64.89 J5.24 ; J5.24 80.77,63.79 ; J5.24 80.77,65.99 ; J3.5 65.56,101.77 ; J3.5 64.46,102.87 ; J3.5 63.36,101.77 ; 79.67,80.13 J5.12 ; J5.12 80.77,81.23 ; J5.12 80.77,79.03 ; J5.48 80.77,35.51 ; J5.48 80.77,33.31 ; J5.48 79.67,34.41 ; J6.48 68.07,35.51 ; J6.48 66.97,34.41 ; J6.48 69.17,34.41 ; J6.48 68.07,33.31 ; 66.97,64.89 J6.24 ; J6.24 68.07,65.99 ; J6.24 69.17,64.89 ; J6.24 68.07,63.79
  PWRT w0.3: 64.5,100.5 64.46,100.54 J3.5
  BOTTOM w0.5: PP6.1 58.1,11.9 v1(58.1,13.1)
3V3: length 79.3
  TOP w0.2: J11.22 v1(5.88,40.25) ; v1(27.65,20.09) 27.65,20.8 C17.2 U5.9 ; 8,76.48 R13.1 v1(8,77.15) ; 8.42,8.5 R20.1 v1(7.76,8.5) ; J12.22 v1(4.12,93.25) ; R17.1 v1(5.7,95.87) ; v1(16.14,56) R15.2 15.48,56 ; R16.1 v1(6.8,95.87) ; J10.22 v1(4.12,75.25) ; 7,76.48 R14.1 v1(7,77.14) ; 56.37,6.35 56.4,6.32 ; 55.3,6.32 56.4,6.32 ; J9.22 v1(4.12,22.25)
  TOP w0.3: v1(49,7) 49,6.38 ; v1(40.78,13.65) U2.1 38.66,13.65 C4.1 ; v1(60.9,1.9) 58.2,1.9 56.4,3.7 56.4,6.32 ; 47.8,6.38 v1(47.8,7) ; U2.3 v1(40.78,12.35)
  TOP w0.5: v1(34,18.15) R4.1 v1(35.1,19.05) ; v1(22.5,102.67) C24.1 v1(23.4,101.8) ; v1(14.7,103.9) J16.4 v1(14.7,102) ; R31.2 v1(21.62,96) ; C11.1 v1(60.9,1.9)
  TOP w1: C11.1 63.98,3 L1.2
  PWRB w0.215: 69.54,100.67 J3.1 ; J3.1 68.44,101.77 ; J3.1 70.64,101.77 ; 66.97,54.73 J6.32 ; J6.32 69.17,54.73 ; J6.32 68.07,55.83 ; J6.32 68.07,53.63 ; J5.44 80.77,40.59 ; J5.44 81.87,39.49 ; J5.44 80.77,38.39 ; J5.44 79.67,39.49 ; 66.97,85.21 J6.8 ; J6.8 68.07,84.11 ; J6.8 69.17,85.21 ; J6.8 68.07,86.31 ; J6.44 68.07,40.59 ; J6.44 69.17,39.49 ; J6.44 66.97,39.49 ; J6.44 68.07,38.39 ; J5.8 81.87,85.21 ; J5.8 80.77,86.31 ; J5.8 79.67,85.21 ; J5.8 80.77,84.11 ; 68.07,68.87 J6.20 ; J6.20 66.97,69.97 ; J6.20 68.07,71.07 ; J6.20 69.17,69.97 ; J5.32 81.87,54.73 ; J5.32 79.67,54.73 ; J5.32 80.77,55.83 ; J5.32 80.77,53.63 ; J3.2 70.64,99.23 ; J3.2 69.54,98.13 ; J3.2 68.44,99.23 ; J3.2 69.54,100.33 ; 79.67,69.97 J5.20 ; J5.20 80.77,68.87 ; J5.20 81.87,69.97 ; J5.20 80.77,71.07
  BOTTOM w0.5: v1(60.9,1.9) 60.9,3.1 PP2.1
5V: length 46.2
  TOP w0.2: R2.1 62.18,9.71 v1(62.18,10.39) ; U1.6 v1(57.8,5.87)
  TOP w0.3: C7.1 61.2,5.3 U1.7 ; C8.1 57.8,9.7 U1.1 ; 11.6,59.45 C15.1 v1(11.6,60.14)
  TOP w0.4: U3.3 13.64,60.14 v1(11.6,60.14) ; v1(74.5,10.05) C2.1 v1(75.78,11) ; v1(68.92,11.6) F1.2 v1(71,10.47)
  TOP w0.5: v1(57.1,10.2) 57.3,10 C8.1 ; v1(61.9,4.8) 61.7,5 C7.1 ; R19.1 v1(42,1.65)
  TOP w1: R1.1 31.5,17.88 37.4,11.97 v1(37.4,10.1)
  PWRT w0.215: J5.4 81.87,90.29 ; J5.4 80.77,91.39 ; J5.4 80.77,89.19 ; J5.4 79.67,90.29 ; J5.56 80.77,25.35 ; J5.56 80.77,23.15 ; J5.56 79.67,24.25 ; J5.56 81.87,24.25 ; J6.56 69.17,24.25 ; J6.56 68.07,23.15 ; J6.56 68.07,25.35 ; J6.56 66.97,24.25 ; J6.4 68.07,91.39 ; J6.4 66.97,90.29 ; J6.4 69.17,90.29 ; J6.4 68.07,89.19
  BOTTOM w0.5: v1(71,10.47) PP3.1
GND: length 1063.6
  TOP w0.2: J9.16 v1(5.88,19.25) ; v1(8.06,50) J13.5 v1(11.42,50) ; v1(11.42,48.5) J13.2 v1(8.06,48.5) ; J12.13 v1(5.88,88.75) ; v1(24,21.4) 24.2,21.2 U5.3 ; J11.1 v1(5.88,29.75) ; v1(11.42,53) J13.11 v1(8.06,53) ; 33.22,62.85 R29.2 v1(32.48,62.85) ; J12.19 v1(5.88,91.75) ; J11.4 v1(5.88,31.25) ; J12.10 v1(5.88,87.25) ; U4.B2 U4.C2 v1(12.5,56.42) ; J10.7 v1(5.88,67.75) ; J11.16 v1(5.88,37.25) ; J9.19 v1(5.88,20.75) ; J11.19 v1(5.88,38.75) ; J12.4 v1(5.88,84.25) ; J9.4 v1(5.88,13.25) ; J9.1 v1(5.88,11.75) ; Q4.2 7.55,61.5 v1(6.95,60.9) ; J9.13 v1(4.12,17.75) ; J11.7 v1(5.88,32.75) ; J10.10 v1(5.88,69.25) ; v1(8.06,56) J13.17 v1(11.42,56) ; v1(62.15,11.94) 62.15,11.29 C6.2 ; J12.16 v1(5.88,90.25) ; 38.43,61.05 R28.2 39.45,61.05 v1(39.55,60.95) ; v1(32.48,80.85) R26.2 33.22,80.85 ; Q5.2 v1(10.4,10.58) ; J10.4 v1(5.88,66.25) ; v1(8.06,51.5) J13.8 v1(11.42,51.5) ; U5.8 26.95,20.4 ; 64.8,8.68 R24.2 v1(64.8,9.34) ; J10.13 v1(5.88,70.75) ; 8.42,9.5 R21.2 v1(7.76,9.5) ; Q2.2 v1(81.98,10) ; v1(54.2,5.66) 54.2,6.32 ; J9.10 v1(5.88,16.25) ; J10.16 v1(5.88,72.25) ; 57.2,21.72 R12.1 v1(57.2,21.06) ; J11.10 v1(5.88,34.25) ; J12.7 v1(5.88,85.75) ; J10.19 v1(5.88,73.75) ; J12.1 v1(5.88,82.75) ; v1(29.55,99) J7.7 ; J10.1 v1(5.88,64.75) ; J9.7 v1(5.88,14.75) ; J11.13 v1(5.88,35.75)
  TOP w0.215: J5.46 80.77,38 ; J5.46 79.72,36.95 ; J5.46 81.82,36.95 ; J5.46 80.77,35.9 ; J5.14 80.77,78.64 ; J5.14 79.72,77.59 ; J5.14 80.77,76.54 ; J5.14 81.82,77.59 ; J6.10 69.12,82.67 ; J6.10 67.02,82.67 ; J6.10 68.07,83.72 ; J6.10 68.07,81.62 ; 67.02,26.79 J6.54 ; J6.54 68.07,27.84 ; J6.54 69.12,26.79 ; J6.54 68.07,25.74 ; 68.07,51.14 J6.34 ; J6.34 68.07,53.24 ; J6.34 69.12,52.19 ; J6.34 67.02,52.19 ; 80.77,81.62 J5.10 ; J5.10 80.77,83.72 ; J5.10 81.82,82.67 ; J5.10 79.72,82.67 ; 79.72,62.35 J5.26 ; J5.26 80.77,61.3 ; J5.26 80.77,63.4 ; J5.26 81.82,62.35 ; 7.08,45.25 J13.20 ; J13.20 8.98,44.25 ; J13.20 8.98,46.25 ; J13.20 10.88,45.25 ; R30.2 82.97,14.6 ; R30.2 82.48,14.11 ; R30.2 82.48,15.09 ; 8.2,61.12 Q4.2 ; Q4.2 8.8,61.5 ; Q4.2 8.2,61.88 ; 80.77,46.06 J5.38 ; J5.38 79.72,47.11 ; J5.38 80.77,48.16 ; J5.38 81.82,47.11 ; J6.58 69.12,21.71 ; J6.58 68.07,20.66 ; J6.58 68.07,22.76 ; J6.58 67.02,21.71 ; 81.2,9.62 Q2.2 ; Q2.2 81.2,10.38 ; Q2.2 80.6,10 ; 4.3,11.75 J9.1 5,11.4 ; D1.1 51.2,2.7 ; D1.1 51.2,1.3 ; D1.1 51.88,2 ; 12.32,57.7 U3.1 ; U3.1 12.85,56.95 ; U3.1 13.38,57.7 ; 16.89,102.2 J16.6 16.89,103.7 ; J5.22 80.77,68.48 ; J5.22 81.82,67.43 ; J5.22 79.72,67.43 ; J5.22 80.77,66.38 ; C17.1 29.07,20.8 ; C17.1 28.59,21.29 ; C17.1 28.59,20.31 ; J6.46 69.12,36.95 ; J6.46 67.02,36.95 ; J6.46 68.07,38 ; J6.46 68.07,35.9 ; 31.05,99.2 J7.4 31.05,100.8 ; 38.1,2 C19.2 35.9,2 ; J5.30 80.77,58.32 ; J5.30 80.77,56.22 ; J5.30 81.82,57.27 ; J5.30 79.72,57.27 ; J6.26 69.12,62.35 ; J6.26 68.07,63.4 ; J6.26 67.02,62.35 ; J6.26 68.07,61.3 ; 32,10.5 J14.4 ; J14.4 31,11.5 ; J14.4 33,11.5 ; J14.4 32,12.5 ; 12.09,58.52 C15.2 11.11,58.52 ; J5.50 80.77,32.92 ; J5.50 80.77,30.82 ; J5.50 79.72,31.87 ; J5.50 81.82,31.87 ; 11.57,6.01 J15.6 9.85,5.03 ; J13.21 4.42,45.25 ; J13.21 3.02,46.25 ; J13.21 1.62,45.25 ; J13.21 3.02,44.25 ; C1.2 17,28.1 ; C1.2 16.22,27 ; C1.2 17.78,27 ; C1.2 17,25.9 ; 18.15,5.03 J15.8 16.43,6.01 ; 56.71,21.71 R12.1 57.69,21.71 ; J16.13 13.41,92.15 ; J16.13 11.11,92.15 ; J16.13 12.26,91.27 ; J16.13 12.26,93.03 ; 14.95,9.46 J4.3 ; J4.3 17.05,9.46 ; J4.3 16,8.41 ; J4.3 16,10.51 ; J6.50 68.07,32.92 ; J6.50 68.07,30.82 ; J6.50 69.12,31.87 ; J6.50 67.02,31.87 ; 18.23,91.27 J16.14 ; J16.14 19.38,92.15 ; J16.14 17.08,92.15 ; J16.14 18.23,93.03 ; J13.23 4.42,59.75 ; J13.23 3.02,58.75 ; J13.23 1.62,59.75 ; J13.23 3.02,60.75 ; C23.2 22.7,98.7 ; C23.2 23.38,98 ; C23.2 22.7,97.3 ; C23.2 22.02,98 ; 68.85,5.03 J2.6 70.58,6.01 ; 67.02,77.59 J6.14 ; J6.14 68.07,78.64 ; J6.14 69.12,77.59 ; J6.14 68.07,76.54 ; 80.77,71.46 J5.18 ; J5.18 81.82,72.51 ; J5.18 79.72,72.51 ; J5.18 80.77,73.56 ; C5.2 40.2,15.7 ; C5.2 40.2,14.3 ; C5.2 40.88,15 ; C10.2 17,33.1 ; C10.2 17,30.9 ; C10.2 16.22,32 ; C10.2 17.78,32 ; 5,29.4 J11.1 4.3,29.75 ; 75.42,6.01 J2.8 77.15,5.03 ; J5.42 81.82,42.03 ; J5.42 80.77,40.98 ; J5.42 79.72,42.03 ; J5.42 80.77,43.08 ; 65.53,20.66 J6.57 ; J6.57 65.53,22.76 ; J6.57 66.58,21.71 ; J6.57 64.48,21.71 ; J14.5 21.93,10.77 ; J14.5 19.95,8.79 ; J14.5 21.93,6.81 ; J14.5 23.91,8.79 ; J6.6 69.12,87.75 ; J6.6 67.02,87.75 ; J6.6 68.07,86.7 ; J6.6 68.07,88.8 ; 17,28.4 C3.2 ; C3.2 16.22,29.5 ; C3.2 17.78,29.5 ; C3.2 17,30.6 ; 8.94,101.95 8.94,102.83 ; 8.94,102.83 7.96,102.83 ; 8.94,102.83 8.94,103.7 ; 8.94,102.83 9.91,102.83 ; 67.02,47.11 J6.38 ; J6.38 68.07,46.06 ; J6.38 69.12,47.11 ; 80.77,91.78 J5.2 ; J5.2 80.77,93.88 ; J5.2 81.82,92.83 ; J5.2 79.72,92.83 ; J13.22 10.88,59.75 ; J13.22 7.08,59.75 ; J13.22 8.98,58.75 ; J13.22 8.98,60.75 ; 10.78,9.8 Q5.2 10.02,9.8 ; 19.86,74.06 19.86,74.55 ; 19.86,74.55 19.38,74.55 ; 19.86,74.55 19.86,75.04 ; 79.72,87.75 J5.6 ; J5.6 80.77,86.7 ; J5.6 81.82,87.75 ; J5.6 80.77,88.8 ; 5,82.4 J12.1 4.3,82.75 ; 40.52,10.71 C9.2 ; C9.2 40.52,11.69 ; C9.2 40.03,11.2 ; J6.2 69.12,92.83 ; J6.2 67.02,92.83 ; J6.2 68.07,91.78 ; J6.2 68.07,93.88 ; J5.58 81.82,21.71 ; J5.58 79.72,21.71 ; J5.58 80.77,20.66 ; J5.58 80.77,22.76 ; 68.07,71.46 J6.18 ; J6.18 67.02,72.51 ; J6.18 69.12,72.51 ; J6.18 68.07,73.56 ; 38.4,2 C20.2 40.6,2 ; C24.2 22.5,100.88 ; C24.2 23.2,100.2 ; C24.2 22.5,99.52 ; C24.2 21.8,100.2 ; 32.73,82.65 R27.2 33.22,83.14 ; 19.86,78.75 19.86,79.24 ; 19.86,78.75 19.86,78.26 ; 19.86,78.75 19.38,78.75 ; 16,59.97 C16.2 15.51,59.48 ; 35.07,6.81 J14.6 ; J14.6 35.07,10.77 ; J14.6 33.09,8.79 ; J14.6 37.05,8.79 ; J5.34 80.77,53.24 ; J5.34 80.77,51.14 ; J5.34 79.72,52.19 ; J5.34 81.82,52.19 ; 67.02,67.43 J6.22 ; J6.22 69.12,67.43 ; J6.22 68.07,66.38 ; J6.22 68.07,68.48 ; 68.07,56.22 J6.30 ; J6.30 67.02,57.27 ; J6.30 69.12,57.27 ; J6.30 68.07,58.32 ; 68.07,18.12 J6.60 ; J6.60 68.07,20.22 ; J6.60 69.12,19.17 ; J6.60 67.02,19.17 ; J16.11 20.25,103.7 ; J16.11 20.25,101.5 ; J16.11 21.04,102.6 ; J6.42 68.07,43.08 ; J6.42 69.12,42.03 ; J6.42 68.07,40.98 ; J6.42 67.02,42.03 ; C4.2 38.99,12.52 ; C4.2 38.01,12.52 ; C4.2 38.5,12.03 ; 74.5,8.78 C2.2 73.4,8 ; 80.77,25.74 J5.54 ; J5.54 80.77,27.84 ; J5.54 81.82,26.79 ; J5.54 79.72,26.79 ; 79.72,19.17 J5.60 ; J5.60 80.77,20.22 ; J5.60 81.82,19.17 ; J5.60 80.77,18.12 ; 21.7,90.15 J1.1 24.1,90.15
  TOP w0.25: U1.3 59.27,7.72 U1.13 59.73,7.28 U1.9
  TOP w0.3: 19.9,78.75 v1(19.9,79.44) ; D1.1 v1(50.35,2) ; J1.31 v1(21.52,81.15) ; J1.55 v1(21.52,70.35) ; 11.6,58.55 C15.2 v1(11.6,57.86) ; v1(22.9,90.8) J1.1 ; J1.146 v1(32.48,43.05) ; J1.61 v1(21.52,68.55) ; J1.98 v1(32.48,57.45) ; J1.80 v1(32.48,62.85) ; J1.97 v1(21.52,57.75) ; J1.38 v1(32.48,79.05) ; J1.133 v1(21.52,46.95) ; J1.92 v1(32.48,59.25) ; J1.62 v1(32.48,68.25) ; J1.13 v1(21.52,86.55) ; v1(40.78,13) U2.2 39.15,13 38.7,12.55 38.5,12.55 ; J1.20 v1(32.5,84.45) ; J1.164 v1(32.48,37.65) ; J1.85 v1(21.52,61.35) ; J1.157 v1(21.52,39.75) ; J1.169 v1(21.52,36.15) ; J1.19 v1(21.52,84.75) ; J1.44 v1(32.48,73.65) ; 29.65,88.05 v1(29.7,88.05) J1.8 ; J1.67 v1(21.52,66.75) ; 19.9,74.55 v1(19.9,73.86) ; J1.195 v1(24.28,28.35) ; J1.152 v1(32.48,41.25) ; J1.91 v1(21.52,59.55) ; J1.110 v1(32.48,53.85) ; U3.1 v1(12.85,58.63) ; J1.14 v1(32.5,86.25) ; J1.109 v1(21.52,54.15) ; C5.2 v1(39.35,15) ; J1.196 v1(29.72,28.05) ; J1.139 v1(21.52,45.15) ; J1.140 v1(32.48,44.85) ; J1.86 v1(32.48,61.05) ; J1.43 v1(21.52,73.95) ; J1.25 v1(21.52,82.95) ; J1.145 v1(21.52,43.35) ; J1.74 v1(32.48,64.65) ; J1.170 v1(32.48,35.85) ; J1.49 v1(21.52,72.15) ; J1.122 v1(32.48,50.25) ; J1.79 v1(21.52,63.15) ; J1.151 v1(21.52,41.55) ; J1.104 v1(32.48,55.65) ; J1.32 v1(32.48,80.85) ; J1.116 v1(32.48,52.05) ; J1.115 v1(21.52,52.35) ; J1.127 v1(21.52,48.75) ; J1.163 v1(21.52,37.95) ; J1.37 v1(21.52,79.35) ; J1.26 v1(32.48,82.65) ; J1.181 v1(21.52,32.55) ; J1.56 v1(32.48,70.05) ; J1.68 v1(32.48,66.45) ; J1.188 v1(29.72,30.45) ; J1.182 v1(32.48,32.25) ; J1.134 v1(32.48,46.65) ; J1.7 v1(21.52,88.35) ; J1.121 v1(21.52,50.55) ; J1.50 v1(32.48,71.85) ; J1.103 v1(21.52,55.95) ; J1.73 v1(21.52,64.95) ; J1.187 v1(24.28,30.75)
  TOP w0.4: v1(74.5,7.05) C2.2 v1(75.78,8) ; J2.5 v1(74.3,6.1) ; J15.5 v1(15.3,6.08)
  TOP w0.5: v1(37,1.05) C19.2 v1(37,2.95) ; v1(39.5,1.05) C20.2 v1(39.5,2.95)
  GNDT w0.215: 79.67,26.79 J5.54 ; J5.54 80.77,27.89 ; J5.54 81.87,26.79 ; J5.54 80.77,25.69 ; J6.57 66.63,21.71 ; J6.57 65.53,20.61 ; J6.57 64.43,21.71 ; J6.57 65.53,22.81 ; 16.73,0.8 J15.9 ; J15.9 16.73,3.2 ; J15.9 15.87,2 ; J15.9 17.58,2 ; 68.07,71.41 J6.18 ; J6.18 69.17,72.51 ; J6.18 68.07,73.61 ; J6.18 66.97,72.51 ; J6.50 68.07,32.97 ; J6.50 68.07,30.77 ; J6.50 66.97,31.87 ; J6.50 69.17,31.87 ; J6.30 69.17,57.27 ; J6.30 68.07,56.17 ; J6.30 68.07,58.37 ; J6.30 66.97,57.27 ; 79.67,42.03 J5.42 ; J5.42 81.87,42.03 ; J5.42 80.77,40.93 ; J5.42 80.77,43.13 ; 80.77,91.73 J5.2 ; J5.2 80.77,93.93 ; J5.2 79.67,92.83 ; J5.2 81.87,92.83 ; J5.22 81.87,67.43 ; J5.22 80.77,68.53 ; J5.22 80.77,66.33 ; J5.22 79.67,67.43 ; J5.58 80.77,22.81 ; J5.58 79.67,21.71 ; J5.58 80.77,20.61 ; J5.58 81.87,21.71 ; J6.34 69.17,52.19 ; J6.34 68.07,51.09 ; J6.34 66.97,52.19 ; J6.34 68.07,53.29 ; J2.6 70.58,6.06 ; J2.6 71.4,5.03 ; J2.6 70.58,4 ; J2.6 69.75,5.03 ; 68.07,66.33 J6.22 ; J6.22 66.97,67.43 ; J6.22 69.17,67.43 ; J6.22 68.07,68.53 ; J13.23 3.02,60.8 ; J13.23 3.02,58.7 ; J13.23 1.57,59.75 ; J13.23 4.47,59.75 ; J15.6 12.4,5.03 ; J15.6 10.75,5.03 ; J15.6 11.57,4 ; J15.6 11.57,6.06 ; J6.2 68.07,93.93 ; J6.2 68.07,91.73 ; J6.2 66.97,92.83 ; J6.2 69.17,92.83 ; 80.77,81.57 J5.10 ; J5.10 79.67,82.67 ; J5.10 81.87,82.67 ; J5.10 80.77,83.77 ; 79.67,77.59 J5.14 ; J5.14 81.87,77.59 ; J5.14 80.77,76.49 ; J5.14 80.77,78.69 ; J13.21 4.47,45.25 ; J13.21 3.02,46.3 ; J13.21 1.57,45.25 ; J13.21 3.02,44.2 ; 68.07,18.07 J6.60 ; J6.60 69.17,19.17 ; J6.60 68.07,20.27 ; J6.60 66.97,19.17 ; 80.77,51.09 J5.34 ; J5.34 79.67,52.19 ; J5.34 81.87,52.19 ; J5.34 80.77,53.29 ; J2.9 75.72,3.2 ; J2.9 75.72,0.8 ; J2.9 76.58,2 ; J2.9 74.87,2 ; J6.46 68.07,38.05 ; J6.46 69.17,36.95 ; J6.46 66.97,36.95 ; J6.46 68.07,35.85 ; J5.60 80.77,20.27 ; J5.60 80.77,18.07 ; J5.60 79.67,19.17 ; J5.60 81.87,19.17 ; 66.97,21.71 J6.58 ; J6.58 69.17,21.71 ; J6.58 68.07,20.61 ; J6.58 68.07,22.81 ; 8.98,58.7 J13.22 ; J13.22 8.98,60.8 ; J13.22 10.93,59.75 ; J13.22 7.03,59.75 ; 66.97,82.67 J6.10 ; J6.10 68.07,83.77 ; J6.10 68.07,81.57 ; J6.10 69.17,82.67 ; 68.07,25.69 J6.54 ; J6.54 66.97,26.79 ; J6.54 69.17,26.79 ; J6.54 68.07,27.89 ; J6.14 68.07,78.69 ; J6.14 68.07,76.49 ; J6.14 69.17,77.59 ; J6.14 66.97,77.59 ; 19.9,8.79 J14.5 ; J14.5 21.93,6.76 ; J14.5 23.96,8.79 ; J14.5 21.93,10.82 ; J6.6 69.17,87.75 ; J6.6 68.07,86.65 ; J6.6 66.97,87.75 ; J6.6 68.07,88.85 ; 30.95,11.5 J14.4 ; J14.4 33.05,11.5 ; J14.4 32,10.45 ; J14.4 32,12.55 ; J6.42 68.07,43.13 ; J6.42 69.17,42.03 ; J6.42 68.07,40.93 ; J6.42 66.97,42.03 ; J6.38 69.17,47.11 ; J6.38 66.97,47.11 ; J6.38 68.07,48.21 ; J6.38 68.07,46.01 ; 79.67,36.95 J5.46 ; J5.46 80.77,35.85 ; J5.46 80.77,38.05 ; J5.46 81.87,36.95 ; J13.20 10.93,45.25 ; J13.20 8.98,46.3 ; J13.20 8.98,44.2 ; J13.20 7.03,45.25 ; J5.26 80.77,63.45 ; J5.26 80.77,61.25 ; J5.26 81.87,62.35 ; J5.26 79.67,62.35 ; 80.77,46.01 J5.38 ; J5.38 81.87,47.11 ; J5.38 80.77,48.21 ; J5.38 79.67,47.11 ; J5.50 81.87,31.87 ; J5.50 79.67,31.87 ; J5.50 80.77,30.77 ; J5.50 80.77,32.97 ; J2.8 76.25,5.03 ; J2.8 75.42,4 ; J2.8 74.6,5.03 ; J2.8 75.42,6.06 ; J14.6 37.1,8.79 ; J14.6 33.04,8.79 ; J14.6 35.07,10.82 ; J14.6 35.07,6.76 ; 79.67,57.27 J5.30 ; J5.30 80.77,56.17 ; J5.30 80.77,58.37 ; J5.30 81.87,57.27 ; 16.43,4 J15.8 ; J15.8 17.25,5.03 ; J15.8 15.6,5.03 ; J15.8 16.43,6.06 ; 68.07,61.25 J6.26 ; J6.26 69.17,62.35 ; J6.26 68.07,63.45 ; J6.26 66.97,62.35 ; 80.77,71.41 J5.18 ; J5.18 79.67,72.51 ; J5.18 81.87,72.51 ; J5.18 80.77,73.61 ; 80.77,86.65 J5.6 ; J5.6 80.77,88.85 ; J5.6 79.67,87.75 ; J5.6 81.87,87.75 ; J2.7 71.13,2 ; J2.7 70.28,0.8 ; J2.7 69.42,2 ; J2.7 70.28,3.2 ; 16,8.36 J4.3 ; J4.3 16,10.56 ; J4.3 14.9,9.46 ; J4.3 17.1,9.46 ; 11.28,0.8 J15.7 ; J15.7 11.28,3.2 ; J15.7 10.42,2 ; J15.7 12.13,2
  GNDB w0.215: J14.5 23.96,8.79 ; J14.5 21.93,6.76 ; J14.5 21.93,10.82 ; J14.5 19.9,8.79 ; J4.3 16,10.56 ; J4.3 16,8.36 ; J4.3 17.1,9.46 ; J4.3 14.9,9.46 ; J5.60 80.77,20.27 ; J5.60 81.87,19.17 ; J5.60 80.77,18.07 ; J5.60 79.67,19.17 ; J6.26 69.17,62.35 ; J6.26 68.07,61.25 ; J6.26 68.07,63.45 ; J6.26 66.97,62.35 ; 74.87,2 J2.9 ; J2.9 76.58,2 ; J2.9 75.72,0.8 ; J2.9 75.72,3.2 ; J5.10 81.87,82.67 ; J5.10 79.67,82.67 ; J5.10 80.77,83.77 ; J5.10 80.77,81.57 ; J5.22 81.87,67.43 ; J5.22 80.77,66.33 ; J5.22 79.67,67.43 ; J5.22 80.77,68.53 ; J6.2 68.07,93.93 ; J6.2 66.97,92.83 ; J6.2 69.17,92.83 ; J6.2 68.07,91.73 ; 66.97,47.11 J6.38 ; J6.38 68.07,48.21 ; J6.38 69.17,47.11 ; J6.38 68.07,46.01 ; 74.6,5.03 J2.8 ; J2.8 75.42,4 ; J2.8 76.25,5.03 ; J2.8 75.42,6.06 ; J15.9 17.58,2 ; J15.9 15.87,2 ; J15.9 16.73,0.8 ; J15.9 16.73,3.2 ; J15.7 12.13,2 ; J15.7 11.28,0.8 ; J15.7 11.28,3.2 ; J15.7 10.42,2 ; J14.4 33.05,11.5 ; J14.4 32,10.45 ; J14.4 32,12.55 ; J14.4 30.95,11.5 ; 65.53,20.61 J6.57 ; J6.57 66.63,21.71 ; J6.57 65.53,22.81 ; J6.57 64.43,21.71 ; J6.6 68.07,88.85 ; J6.6 68.07,86.65 ; J6.6 69.17,87.75 ; J6.6 66.97,87.75 ; J5.2 81.87,92.83 ; J5.2 80.77,93.93 ; J5.2 79.67,92.83 ; J5.2 80.77,91.73 ; 80.77,86.65 J5.6 ; J5.6 79.67,87.75 ; J5.6 81.87,87.75 ; J5.6 80.77,88.85 ; J6.58 69.17,21.71 ; J6.58 68.07,20.61 ; J6.58 68.07,22.81 ; J6.58 66.97,21.71 ; 33.04,8.79 J14.6 ; J14.6 35.07,6.76 ; J14.6 37.1,8.79 ; J14.6 35.07,10.82 ; 80.77,71.41 J5.18 ; J5.18 81.87,72.51 ; J5.18 79.67,72.51 ; J5.18 80.77,73.61 ; J6.60 69.17,19.17 ; J6.60 66.97,19.17 ; J6.60 68.07,18.07 ; J6.60 68.07,20.27 ; 79.67,42.03 J5.42 ; J5.42 81.87,42.03 ; J5.42 80.77,43.13 ; J5.42 80.77,40.93 ; J5.30 80.77,58.37 ; J5.30 81.87,57.27 ; J5.30 80.77,56.17 ; J5.30 79.67,57.27 ; 80.77,30.77 J5.50 ; J5.50 79.67,31.87 ; J5.50 80.77,32.97 ; J5.50 81.87,31.87 ; J2.6 70.58,6.06 ; J2.6 70.58,4 ; J2.6 71.4,5.03 ; J2.6 69.75,5.03 ; 79.67,52.19 J5.34 ; J5.34 80.77,53.29 ; J5.34 81.87,52.19 ; J5.34 80.77,51.09 ; 7.03,59.75 J13.22 ; J13.22 8.98,58.7 ; J13.22 10.93,59.75 ; J13.22 8.98,60.8 ; 80.77,20.61 J5.58 ; J5.58 79.67,21.71 ; J5.58 81.87,21.71 ; J5.58 80.77,22.81 ; J5.38 80.77,48.21 ; J5.38 80.77,46.01 ; J5.38 81.87,47.11 ; J5.38 79.67,47.11 ; J6.50 69.17,31.87 ; J6.50 68.07,32.97 ; J6.50 66.97,31.87 ; J6.50 68.07,30.77 ; 16.43,4 J15.8 ; J15.8 15.6,5.03 ; J15.8 17.25,5.03 ; J15.8 16.43,6.06 ; J6.14 69.17,77.59 ; J6.14 68.07,78.69 ; J6.14 66.97,77.59 ; J6.14 68.07,76.49 ; 68.07,71.41 J6.18 ; J6.18 68.07,73.61 ; J6.18 69.17,72.51 ; J6.18 66.97,72.51 ; J6.34 69.17,52.19 ; J6.34 66.97,52.19 ; J6.34 68.07,53.29 ; J6.34 68.07,51.09 ; J2.7 71.13,2 ; J2.7 70.28,3.2 ; J2.7 69.42,2 ; J2.7 70.28,0.8 ; J6.42 68.07,43.13 ; J6.42 66.97,42.03 ; J6.42 69.17,42.03 ; J6.42 68.07,40.93 ; 68.07,56.17 J6.30 ; J6.30 66.97,57.27 ; J6.30 68.07,58.37 ; J6.30 69.17,57.27 ; 8.98,44.2 J13.20 ; J13.20 7.03,45.25 ; J13.20 8.98,46.3 ; J13.20 10.93,45.25 ; 80.77,25.69 J5.54 ; J5.54 79.67,26.79 ; J5.54 80.77,27.89 ; J5.54 81.87,26.79 ; 80.77,35.85 J5.46 ; J5.46 81.87,36.95 ; J5.46 80.77,38.05 ; J5.46 79.67,36.95 ; J6.46 68.07,38.05 ; J6.46 68.07,35.85 ; J6.46 69.17,36.95 ; J6.46 66.97,36.95 ; J13.21 4.47,45.25 ; J13.21 3.02,46.3 ; J13.21 1.57,45.25 ; J13.21 3.02,44.2 ; J6.54 68.07,27.89 ; J6.54 69.17,26.79 ; J6.54 66.97,26.79 ; J6.54 68.07,25.69 ; J13.23 3.02,60.8 ; J13.23 1.57,59.75 ; J13.23 3.02,58.7 ; J13.23 4.47,59.75 ; J6.22 69.17,67.43 ; J6.22 68.07,66.33 ; J6.22 68.07,68.53 ; J6.22 66.97,67.43 ; J5.26 80.77,63.45 ; J5.26 80.77,61.25 ; J5.26 81.87,62.35 ; J5.26 79.67,62.35 ; 66.97,82.67 J6.10 ; J6.10 69.17,82.67 ; J6.10 68.07,83.77 ; J6.10 68.07,81.57 ; J15.6 11.57,6.06 ; J15.6 11.57,4 ; J15.6 10.75,5.03 ; J15.6 12.4,5.03 ; J5.14 81.87,77.59 ; J5.14 80.77,76.49 ; J5.14 79.67,77.59 ; J5.14 80.77,78.69
  BOTTOM w0.215: J5.26 80.77,63.4 ; J5.26 79.72,62.35 ; J5.26 81.82,62.35 ; J5.26 80.77,61.3 ; J5.54 81.82,26.79 ; J5.54 79.72,26.79 ; J5.54 80.77,25.74 ; J5.54 80.77,27.84 ; PP19.1 9,100.2 ; PP19.1 7.8,99 ; PP19.1 9,97.8 ; PP19.1 10.2,99 ; 68.07,18.12 J6.60 ; J6.60 67.02,19.17 ; J6.60 69.12,19.17 ; 69.12,82.67 J6.10 67.02,82.67 ; 7.08,45.25 J13.20 ; J13.20 10.88,45.25 ; J13.20 8.98,44.25 ; J13.20 8.98,46.25 ; J5.6 80.77,88.8 ; J5.6 81.82,87.75 ; J5.6 79.72,87.75 ; J5.6 80.77,86.7 ; 1.62,59.75 J13.23 ; J13.23 4.42,59.75 ; J13.23 3.02,58.75 ; J13.23 3.02,60.75 ; 80.77,40.98 J5.42 ; J5.42 80.77,43.08 ; J5.42 81.82,42.03 ; J5.42 79.72,42.03 ; 69.12,21.71 J6.58 67.02,21.71 ; 80.77,76.54 J5.14 ; J5.14 79.72,77.59 ; J5.14 81.82,77.59 ; J5.14 80.77,78.64 ; 67.02,42.03 J6.42 69.12,42.03 ; 79.72,19.17 J5.60 ; J5.60 80.77,20.22 ; J5.60 80.77,18.12 ; J5.60 81.82,19.17 ; J15.9 17.53,2 ; J15.9 15.92,2 ; J15.9 16.73,3.15 ; J15.9 16.73,0.85 ; J4.3 17.05,9.46 ; J4.3 14.95,9.46 ; J4.3 16,8.41 ; J4.3 16,10.51 ; 69.12,62.35 J6.26 67.02,62.35 ; 67.02,67.43 J6.22 69.12,67.43 ; J5.50 80.77,32.92 ; J5.50 80.77,30.82 ; J5.50 79.72,31.87 ; J5.50 81.82,31.87 ; 32,10.5 J14.4 ; J14.4 33,11.5 ; J14.4 32,12.5 ; J14.4 31,11.5 ; 69.8,5.03 J2.6 ; J2.6 71.35,5.03 ; J2.6 70.58,4.05 ; J2.6 70.58,6.01 ; J13.22 10.88,59.75 ; J13.22 8.98,58.75 ; J13.22 7.08,59.75 ; J13.22 8.98,60.75 ; J5.22 81.82,67.43 ; J5.22 80.77,66.38 ; J5.22 80.77,68.48 ; J5.22 79.72,67.43 ; 3.02,44.25 J13.21 ; J13.21 1.62,45.25 ; J13.21 3.02,46.25 ; J13.21 4.42,45.25 ; J14.6 35.07,10.77 ; J14.6 35.07,6.81 ; J14.6 37.05,8.79 ; J14.6 33.09,8.79 ; 64.48,21.71 J6.57 66.58,21.71 ; J5.18 81.82,72.51 ; J5.18 80.77,71.46 ; J5.18 79.72,72.51 ; J5.18 80.77,73.56 ; 79.72,47.11 J5.38 ; J5.38 80.77,48.16 ; J5.38 81.82,47.11 ; J5.38 80.77,46.06 ; 69.12,36.95 J6.46 67.02,36.95 ; 75.42,4.05 J2.8 ; J2.8 75.42,6.01 ; J2.8 74.65,5.03 ; J2.8 76.2,5.03 ; 69.12,77.59 J6.14 67.02,77.59 ; J15.6 11.57,6.01 ; J15.6 10.8,5.03 ; J15.6 12.35,5.03 ; J15.6 11.57,4.05 ; 71.8,2.5 PP8.1 ; PP8.1 74.2,2.5 ; PP8.1 73,3.7 ; PP8.1 73,1.3 ; 21.93,6.81 J14.5 ; J14.5 19.95,8.79 ; J14.5 23.91,8.79 ; J14.5 21.93,10.77 ; 67.02,31.87 J6.50 69.12,31.87 ; J5.2 80.77,93.88 ; J5.2 81.82,92.83 ; J5.2 80.77,91.78 ; J5.2 79.72,92.83 ; 74.92,2 J2.9 ; J2.9 75.72,3.15 ; J2.9 76.53,2 ; J2.9 75.72,0.85 ; 67.02,52.19 J6.34 69.12,52.19 ; 69.12,57.27 J6.30 67.02,57.27 ; J5.58 80.77,22.76 ; J5.58 79.72,21.71 ; J5.58 81.82,21.71 ; J5.58 80.77,20.66 ; 80.77,56.22 J5.30 ; J5.30 81.82,57.27 ; J5.30 79.72,57.27 ; J5.30 80.77,58.32 ; 79.72,82.67 J5.10 ; J5.10 80.77,81.62 ; J5.10 81.82,82.67 ; J5.10 80.77,83.72 ; J2.7 70.28,3.15 ; J2.7 69.47,2 ; J2.7 71.08,2 ; J2.7 70.28,0.85 ; 80.77,51.14 J5.34 ; J5.34 80.77,53.24 ; J5.34 81.82,52.19 ; J5.34 79.72,52.19 ; J15.7 12.08,2 ; J15.7 11.28,3.15 ; J15.7 11.28,0.85 ; J15.7 10.47,2 ; 69.12,72.51 J6.18 67.02,72.51 ; 69.12,47.11 J6.38 67.02,47.11 ; 67.02,26.79 J6.54 69.12,26.79 ; PP18.1 19.7,100.5 ; PP18.1 18.5,99.3 ; PP18.1 17.3,100.5 ; 79.72,36.95 J5.46 ; J5.46 80.77,35.9 ; J5.46 80.77,38 ; J5.46 81.82,36.95 ; 15.65,5.03 J15.8 ; J15.8 16.43,6.01 ; J15.8 17.2,5.03 ; J15.8 16.43,4.05 ; 76.3,8.5 PP5.1 ; PP5.1 77.5,7.3 ; PP5.1 78.7,8.5 ; PP5.1 77.5,9.7 ; J6.2 69.12,92.83 ; J6.2 68.07,93.88 ; J6.2 67.02,92.83 ; 67.02,87.75 J6.6 69.12,87.75
  vias: v1(1,98) v1(1,95) v1(1,91) v1(1,87) v1(1,83) v1(1,79) v1(1,75) v1(1,71) v1(1,67) v1(1,63) v1(1,59) v1(1,55) v1(1,51) v1(1,47) v1(1,43) v1(1,39) v1(1,35) v1(1,31) v1(1,27) v1(1,23) v1(1,19) v1(1,15) v1(1,11) v1(1,7) v1(6,17.8) v1(6.55,63.3) v1(7,104) v1(7,1) v1(8.3,17.8) v1(9,12) v1(12.85,87.7) v1(12.85,85.3) v1(14,19.5) v1(15.2,84.7) v1(15.2,82.3) v1(16,60.15) v1(16.9,103.9) v1(16.9,102) v1(17.05,61.65) v1(17.8,86.4) v1(18,32) v1(18,29.5) v1(18,27) v1(18.1,74.6) v1(18.15,57.75) v1(18.8,59.8) v1(18.8,55.75) v1(19,81.5) v1(19,7.5) v1(19,1) v1(19.5,24.5) v1(19.6,69.3) v1(21.8,98) v1(22.6,99.1) v1(23,104) v1(23,76.5) v1(23,1) v1(23.4,100.2) v1(24,18.8) v1(25,45.5) v1(25,5) v1(25.5,51) v1(25.7,14) v1(26.95,20.3) v1(27,104) v1(27,1) v1(28.5,95.85) v1(28.5,76.5) v1(29.3,20.8) v1(31,104) v1(31,92) v1(31,8.5) v1(31,1) v1(31.05,99) v1(32.5,15) v1(32.6,88.3) v1(34.9,80.85) v1(34.9,62.85) v1(35,104) v1(35,1) v1(39,104) v1(39,31) v1(39.5,51.5) v1(39.5,43) v1(39.8,11.2) v1(40,77.5) v1(42.8,99.5) v1(43,104) v1(43,18.5) v1(43,1) v1(44,11.5) v1(46,26.5) v1(47,104) v1(47,1) v1(48,15) v1(49.8,104) v1(50.5,74.5) v1(51,31.5) v1(51,23) v1(51,1) v1(51.5,12) v1(52.8,104) v1(55,104) v1(55,1) v1(55.5,17.5) v1(56.7,35.4) v1(59,104) v1(59,1) v1(59.2,13.05) v1(60.15,13.05) v1(60.5,98.5) v1(62,104) v1(63,1) v1(67,13.5) v1(67,1) v1(68,104) v1(70,104) v1(71,17.5) v1(74,104) v1(74,97) v1(75.5,101) v1(76,18.5) v1(76.5,13.5) v1(78,104) v1(78,1) v1(80,15.1) v1(84,98) v1(84,94) v1(84,90) v1(84,86) v1(84,82) v1(84,78) v1(84,74) v1(84,70) v1(84,66) v1(84,62) v1(84,58) v1(84,55) v1(84,51) v1(84,47) v1(84,43) v1(84,39) v1(84,35) v1(84,31) v1(84,27) v1(84,23) v1(84,19) v1(84,15) v1(84,11) v1(84,7)
VBUSA: length 19.9
  TOP w0.5: R19.2 40.05,4.45 C20.1
  TOP w1: C20.1 C19.1 31.5,5 J14.1
VBUSB: length 15
  TOP w0.2: 11.4,9.57 12.7,8.28 J15.1 ; 11.4,9.57 10.85,9.03 9.83,9.03 9.38,9.47 R21.1 ; 11.4,9.57 Q5.1 v1(11.4,10.65)
  PWRB w0.2: v1(11.4,10.65) 12.11,10.65 J4.1
VDD_CORE: length 46.1
  TOP w0.2: J1.179 24.2,33.15 v1(24.55,32.8) ; v1(51.65,33.15) 56.55,33.15 62.91,26.79 J6.53
  BOTTOM w0.2: v1(51.65,33.15) 50.6,32.1 34.5,32.1 33.8,32.8 v1(24.55,32.8)
CAM0_CN: length 53.3
  TOP w0.116: v1(33.56,43.56) 33.29,43.83 32.44,43.83 32.25,43.65 J1.144 ; J9.8 4.89,15.36 4.13,15.36 3.86,15.09 v1(3.44,15.09)
  BOTTOM w0.116: v1(3.44,15.09) 3.86,15.09 4.13,15.36 8.81,15.36 9.4,15.95 9.4,27.55 20.55,38.7 23.5,38.7 28.63,43.82 32.88,43.82 33.15,43.56 v1(33.56,43.56)
CAM0_CP: length 53.3
  TOP w0.116: J1.142 32.25,44.25 32.44,44.07 33.29,44.07 v1(33.56,44.34) ; v1(3.44,15.88) 3.86,15.88 4.13,15.61 4.86,15.61 J9.9
  BOTTOM w0.116: v1(33.56,44.34) 33.15,44.34 32.88,44.08 28.53,44.08 23.4,38.95 20.45,38.95 9.15,27.65 9.15,16.05 8.71,15.61 4.13,15.61 3.86,15.88 v1(3.44,15.88)
CAM0_DN0: length 53.5
  TOP w0.116: J9.2 5.67,12.25 5.8,12.37 6.37,12.37 7.29,13.29 7.29,17.11 7.56,17.38 v1(7.56,17.8) ; J1.138 32.25,45.45 32.44,45.63 33.24,45.63 v1(33.56,45.31)
  BOTTOM w0.116: v1(33.56,45.31) 33.14,45.31 32.87,45.58 28.23,45.58 23.15,40.5 20.6,40.5 7.29,27.19 7.29,18.49 7.56,18.22 v1(7.56,17.8)
CAM0_DN1: length 53.3
  TOP w0.116: v1(3.44,13.59) 3.86,13.59 4.13,13.86 4.89,13.86 J9.5 ; v1(33.56,41.76) 33.29,42.03 32.44,42.03 32.25,41.85 J1.150
  BOTTOM w0.116: v1(33.56,41.76) 33.15,41.76 32.88,42.02 29.27,42.02 24.15,36.9 20.6,36.9 11.15,27.45 11.15,15.6 9.41,13.86 4.13,13.86 3.86,13.59 v1(3.44,13.59)
CAM0_DP0: length 53.5
  TOP w0.116: J9.3 5.67,12.75 5.8,12.63 6.27,12.63 7.04,13.39 7.04,17.11 6.77,17.38 v1(6.77,17.8) ; v1(33.56,46.1) 33.33,45.87 32.44,45.87 32.25,46.05 J1.136
  BOTTOM w0.116: v1(33.56,46.1) 33.14,46.1 32.87,45.83 28.13,45.83 23.05,40.75 20.5,40.75 7.04,27.29 7.04,18.49 6.77,18.22 v1(6.77,17.8)
CAM0_DP1: length 53.3
  TOP w0.116: J9.6 4.86,14.11 4.13,14.11 3.86,14.38 v1(3.44,14.38) ; v1(33.56,42.54) 33.29,42.27 32.44,42.27 32.25,42.45 J1.148
  BOTTOM w0.116: v1(3.44,14.38) 3.86,14.38 4.13,14.11 9.31,14.11 10.9,15.7 10.9,27.55 20.5,37.15 24.05,37.15 29.17,42.28 32.88,42.28 33.15,42.54 v1(33.56,42.54)
CAM0_IO0: length 75.7
  TOP w0.2: v1(3.7,19.2) 4.25,19.75 J9.17
  PWRB w0.2: J6.51 58.36,36.5 23.8,36.5 16.9,29.6 16.9,26.7 8.8,18.6 5.4,18.6 4.8,19.2 v1(3.7,19.2)
CAM0_IO1: length 74.8
  TOP w0.2: J9.18 v1(3.95,20.25)
  PWRB w0.2: v1(3.95,20.25) 9.05,20.25 16.35,27.55 16.35,32.75 20.63,37.03 20.91,37.03 60.37,37.03 J6.49
CAM1_CN: length 21.7
  TOP w0.116: J11.8 5.67,33.25 5.8,33.37 9.62,33.37 18.57,42.32 21.55,42.32 21.73,42.15 J1.149
CAM1_CP: length 21.7
  TOP w0.116: J11.9 5.67,33.75 5.8,33.63 9.52,33.63 18.47,42.58 21.55,42.58 21.73,42.75 J1.147
CAM1_DN0: length 21.5
  TOP w0.116: J11.2 5.67,30.25 5.8,30.37 11.38,30.37 19.73,38.72 21.55,38.72 21.73,38.55 J1.161
CAM1_DN1: length 21.6
  TOP w0.116: J1.155 21.73,40.35 21.55,40.52 19.08,40.52 10.43,31.87 5.8,31.87 5.67,31.75 J11.5
CAM1_DN2: length 21.9
  TOP w0.116: J1.143 21.73,43.95 21.55,44.12 18.03,44.12 8.78,34.87 5.8,34.87 5.67,34.75 J11.11
CAM1_DN3: length 22
  TOP w0.116: J11.14 5.67,36.25 5.8,36.37 8.28,36.37 17.83,45.92 21.55,45.92 21.73,45.75 J1.137
CAM1_DP0: length 21.5
  TOP w0.116: J1.159 21.73,39.15 21.55,38.98 19.63,38.98 11.28,30.63 5.8,30.63 5.67,30.75 J11.3
CAM1_DP1: length 21.6
  TOP w0.116: J11.6 5.67,32.25 5.8,32.13 10.33,32.13 18.98,40.78 21.55,40.78 21.73,40.95 J1.153
CAM1_DP2: length 21.9
  TOP w0.116: J1.141 21.73,44.55 21.55,44.38 17.93,44.38 8.68,35.13 5.8,35.13 5.67,35.25 J11.12
CAM1_DP3: length 22
  TOP w0.116: J1.135 21.73,46.35 21.55,46.18 17.73,46.18 8.18,36.63 5.8,36.63 5.67,36.75 J11.15
CAM1_IO0: length 62
  TOP w0.2: J11.17 v1(6.65,37.75)
  PWRB w0.2: J6.43 64.67,40.35 16.85,40.35 14.25,37.75 v1(6.65,37.75)
CAM1_IO1: length 64
  TOP w0.2: J11.18 v1(4.05,38.25)
  PWRB w0.2: J6.41 64.3,40.8 32.73,40.8 32.68,40.75 32.27,40.75 32.22,40.8 16.4,40.8 13.85,38.25 v1(4.05,38.25)
CD0_SCL: length 139
  TOP w0.2: R13.2 8,74.98 7.27,74.25 J10.20 2.9,74.25 v1(2.4,73.75) ; J9.20 3.25,21.25 v1(2.8,20.8)
  PWRT w0.2: v1(2.4,73.75) 5.3,70.85 5.3,24.4 2.8,21.9 v1(2.8,20.8)
  PWRB w0.2: v1(2.8,20.8) 4.4,20.8 4.9,21.3 8.6,21.3 15.75,28.45 15.75,33.65 20.6,38.5 61.44,38.5 J6.47
CD0_SDA: length 138.1
  TOP w0.2: R14.2 6.24,74.75 J10.21 v1(1.95,74.75) ; J9.21 v1(2,21.75)
  PWRT w0.2: v1(1.95,74.75) 1.61,74.41 1.61,73.69 4.8,70.5 4.8,24.55 v1(2,21.75)
  PWRB w0.2: J6.45 63.38,39.1 20.3,39.1 15.15,33.95 15.15,29.75 7.15,21.75 v1(2,21.75)
CD1_SCL: length 126.1
  TOP w0.15: R16.2 6.8,93.33 5.72,92.25 J12.20
  TOP w0.2: J12.20 v1(4.12,92.25) ; J11.20 v1(4.15,39.25)
  PWRB w0.2: v1(4.12,92.25) 5.3,91.07 5.3,63.3 5.7,62.9 5.7,43.5 v1(6.6,42.6) ; J6.39 62.7,47.4 23.4,47.4 22.2,46.2 20.7,46.2 13.75,39.25 v1(4.15,39.25)
  BOTTOM w0.2: v1(6.6,42.6) 6.1,42.6 4.15,40.65 v1(4.15,39.25)
